# EAGLE board UART_Block-Panel-v10 (EAGLE 6.6.0), part 1 of 3
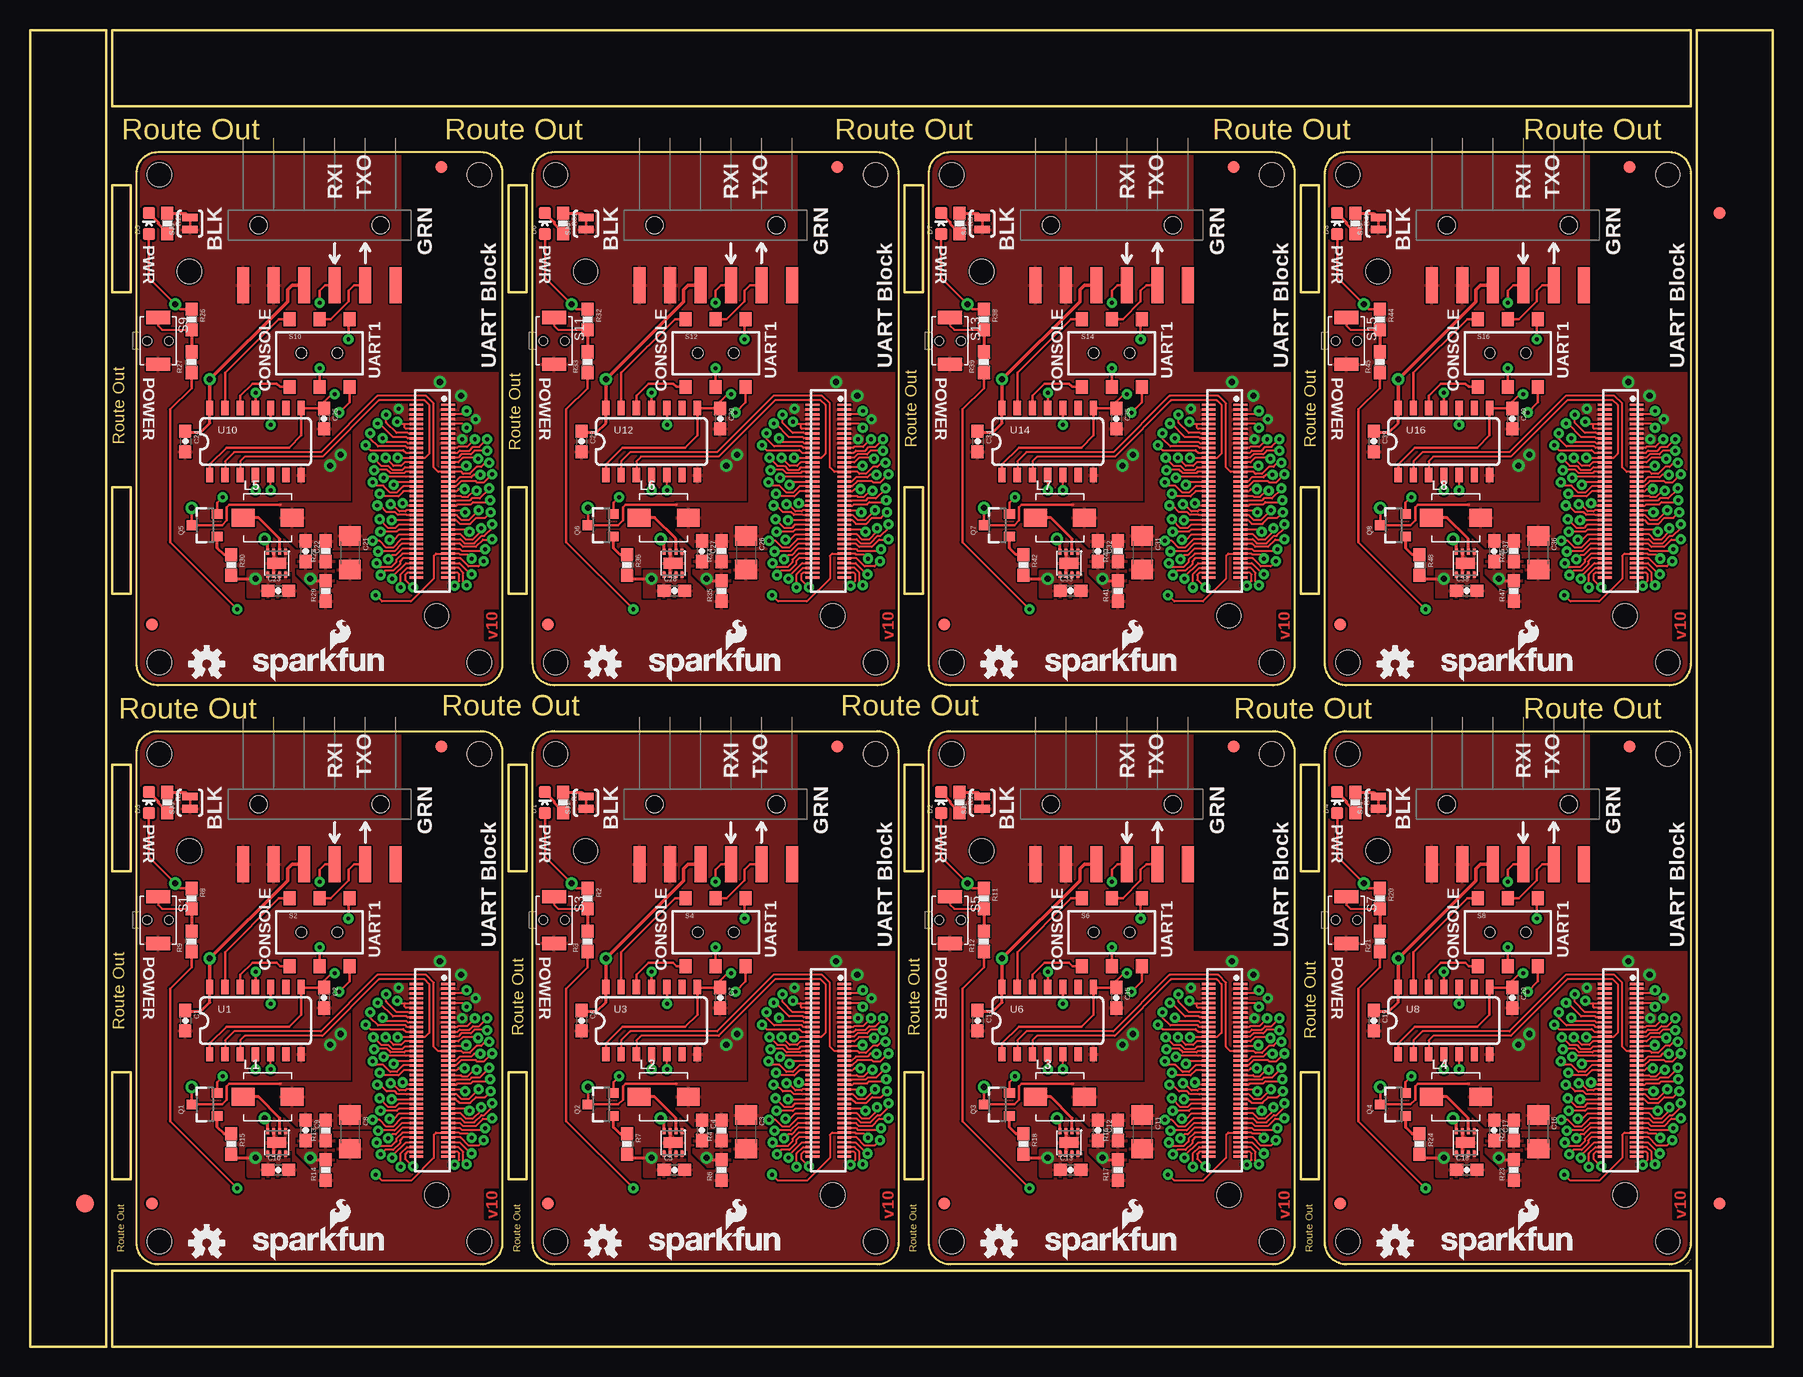
[diagram p0: board, top side]
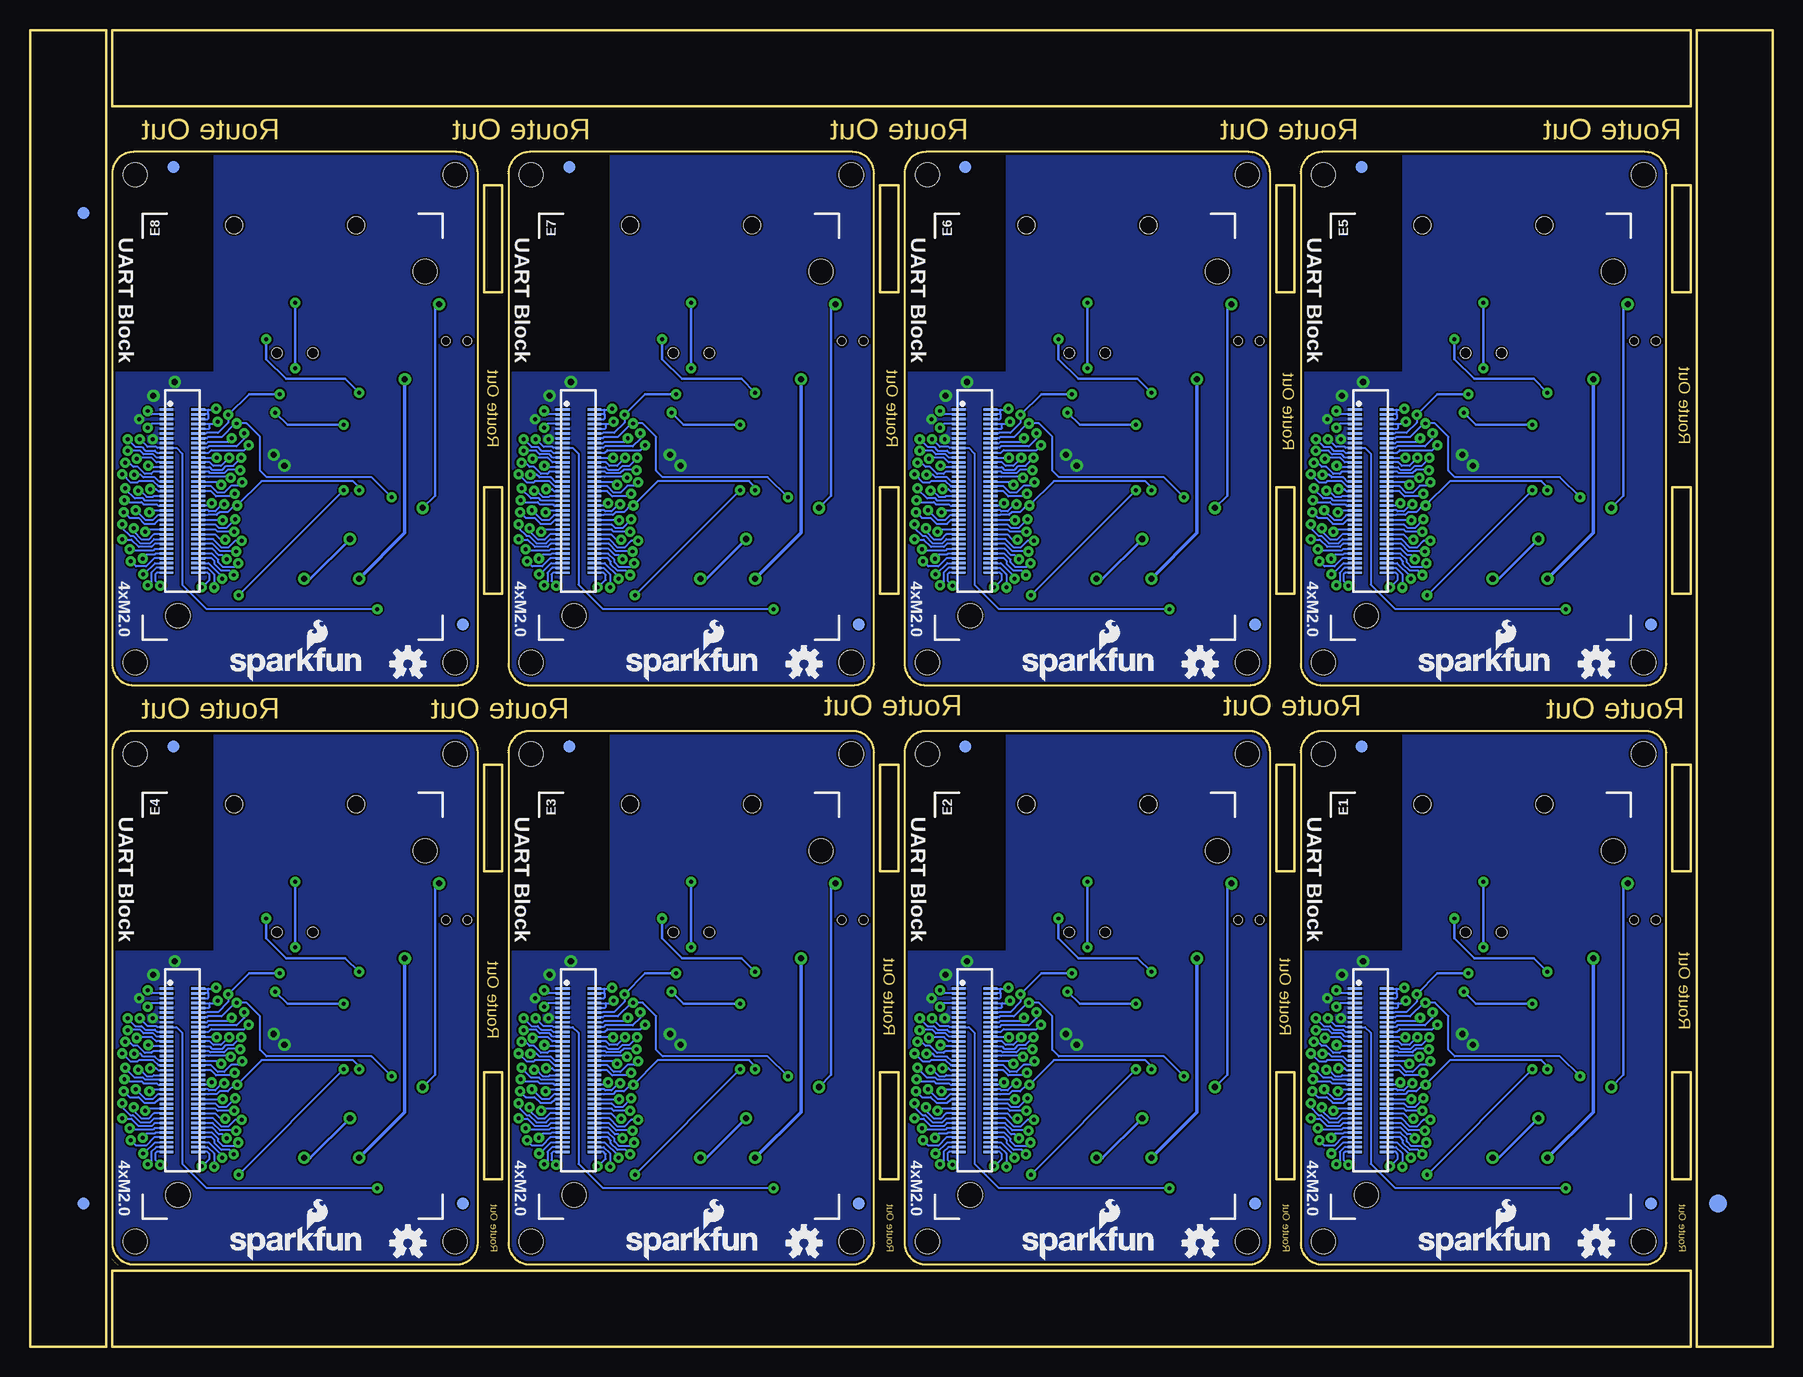
[diagram p1: board, bottom side, seen from below]

Size 145.29 x 109.73 mm. Coordinates in mm from the lower left corner, seen from the top.
Outline: 6.35,79.25 6.35,0 0,0 0,29.72
Outline: 145.29,79.25 145.29,0 138.94,0 138.94,29.72
Outline: 138.94,27.18 138.94,109.73 145.29,109.73 145.29,76.71
Outline: 0,27.18 0,109.73 6.35,109.73 6.35,76.71
Outline: 39.37,49.53 39.37,8.64 arc-90 37.59,6.86 10.67,6.86 arc-90 8.89,8.64 8.89,49.53 arc-90 10.67,51.31 37.59,51.31 arc-90 39.37,49.53
Outline: 72.39,49.53 72.39,8.64 arc-90 70.61,6.86 43.69,6.86 arc-90 41.91,8.64 41.91,49.53 arc-90 43.69,51.31 70.61,51.31 arc-90 72.39,49.53
Outline: 105.41,49.53 105.41,8.64 arc-90 103.63,6.86 76.71,6.86 arc-90 74.93,8.64 74.93,49.53 arc-90 76.71,51.31 103.63,51.31 arc-90 105.41,49.53
Outline: 138.43,49.53 138.43,8.64 arc-90 136.65,6.86 109.73,6.86 arc-90 107.95,8.64 107.95,49.53 arc-90 109.73,51.31 136.65,51.31 arc-90 138.43,49.53
Outline: 39.37,97.79 39.37,56.9 arc-90 37.59,55.12 10.67,55.12 arc-90 8.89,56.9 8.89,97.79 arc-90 10.67,99.57 37.59,99.57 arc-90 39.37,97.79
Outline: 72.39,97.79 72.39,56.9 arc-90 70.61,55.12 43.69,55.12 arc-90 41.91,56.9 41.91,97.79 arc-90 43.69,99.57 70.61,99.57 arc-90 72.39,97.79
Outline: 105.41,97.79 105.41,56.9 arc-90 103.63,55.12 76.71,55.12 arc-90 74.93,56.9 74.93,97.79 arc-90 76.71,99.57 103.63,99.57 arc-90 105.41,97.79
Outline: 138.43,97.79 138.43,56.9 arc-90 136.65,55.12 109.73,55.12 arc-90 107.95,56.9 107.95,97.79 arc-90 109.73,99.57 136.65,99.57 arc-90 138.43,97.79
Outline: 6.86,0 138.43,0 138.43,6.35 6.86,6.35 6.86,0
Outline: 138.43,109.73 6.86,109.73 6.86,103.38 138.43,103.38 138.43,109.73
Outline: 8.38,39.62 8.38,48.51 6.86,48.51 6.86,39.62 8.38,39.62
Outline: 8.38,13.97 8.38,22.86 6.86,22.86 6.86,13.97 8.38,13.97
Outline: 41.4,13.97 41.4,22.86 39.88,22.86 39.88,13.97 41.4,13.97
Outline: 74.42,13.97 74.42,22.86 72.9,22.86 72.9,13.97 74.42,13.97
Outline: 107.44,13.97 107.44,22.86 105.92,22.86 105.92,13.97 107.44,13.97
Outline: 41.4,39.62 41.4,48.51 39.88,48.51 39.88,39.62 41.4,39.62
Outline: 74.42,39.62 74.42,48.51 72.9,48.51 72.9,39.62 74.42,39.62
Outline: 107.44,39.62 107.44,48.51 105.92,48.51 105.92,39.62 107.44,39.62
Outline: 8.38,62.74 8.38,71.63 6.86,71.63 6.86,62.74 8.38,62.74
Outline: 41.4,62.74 41.4,71.63 39.88,71.63 39.88,62.74 41.4,62.74
Outline: 74.42,62.74 74.42,71.63 72.9,71.63 72.9,62.74 74.42,62.74
Outline: 107.44,62.74 107.44,71.63 105.92,71.63 105.92,62.74 107.44,62.74
Outline: 107.44,87.88 107.44,96.77 105.92,96.77 105.92,87.88 107.44,87.88
Outline: 74.42,87.88 74.42,96.77 72.9,96.77 72.9,87.88 74.42,87.88
Outline: 41.4,87.88 41.4,96.77 39.88,96.77 39.88,87.88 41.4,87.88
Outline: 8.38,87.88 8.38,96.77 6.86,96.77 6.86,87.88 8.38,87.88
Copper layers (1*16): Top 0.035mm / dielectric 1.5mm / Bottom 0.035mm
Design rules "SparkFun-2-layer *": minimum track width 6mil, minimum drill 13mil, track to track 6mil, track to pad 6mil, pad to pad 6mil, via to via 6mil, smd to smd 6mil, copper to edge 8mil, drill to drill 8mil, minimum pad ring 12mil, minimum via ring 10mil, stop-mask expansion 4mil, vias tented up to drill 20mil, thermal gap 6mil
Holes 2 mm at 37.47,8.76 10.79,8.76 10.79,49.4 37.47,49.4 70.48,8.76 43.81,8.76 43.81,49.4 70.48,49.4 103.5,8.76 76.83,8.76 76.83,49.4 103.5,49.4 136.53,8.76 109.86,8.76 109.86,49.4 136.53,49.4 37.47,57.02 10.79,57.02 10.79,97.66 37.47,97.66 70.48,57.02 43.81,57.02 43.81,97.66 70.48,97.66 103.5,57.02 76.83,57.02 76.83,97.66 103.5,97.66 136.53,57.02 109.86,57.02 109.86,97.66 136.53,97.66
tRestrict: area 31,33 to 39.4,51.3; area 64,33 to 72.4,51.3; area 97,33 to 105.4,51.3; area 130,33 to 138.4,51.3; area 31,81.3 to 39.4,99.6; area 64,81.3 to 72.4,99.6; area 97,81.3 to 105.4,99.6; area 130,81.3 to 138.4,99.6; 24 lines
bRestrict: area 31,33 to 39.4,51.3; area 64,33 to 72.4,51.3; area 97,33 to 105.4,51.3; area 130,33 to 138.4,51.3; area 31,81.3 to 39.4,99.6; area 64,81.3 to 72.4,99.6; area 97,81.3 to 105.4,99.6; area 130,81.3 to 138.4,99.6

## Footprints (pad centres in the part's own frame; a part is rotated, then mirrored left to right if it is on the bottom)
0603-CAP = smd 1.1 x 1: 1 -0.85,0; 2 0.85,0
1206 = smd 1.6 x 1.8: 1 -1.4,0; 2 1.4,0
LED-0603 = smd 1 x 1: A 0,-0.877; C 0,0.877
EDISON_DAUGHTER = smd 1.14 x 0.2: 1 1.98,19.17; 2 4.62,19.17; 3 1.98,18.77; 4 4.62,18.77; 5 1.98,18.37; 6 4.62,18.37; 7 1.98,17.97; 8 4.62,17.97; 9 1.98,17.57; 10 4.62,17.57; 11 1.98,17.17; 12 4.62,17.17; 13 1.98,16.77; 14 4.62,16.77; 15 1.98,16.37; 16 4.62,16.37; 17 1.98,15.97; 18 4.62,15.97; 19 1.98,15.57; 20 4.62,15.57; 21 1.98,15.17; 22 4.62,15.17; 23 1.98,14.77; 24 4.62,14.77; 25 1.98,14.37; 26 4.62,14.37; 27 1.98,13.97; 28 4.62,13.97; 29 1.98,13.57; 30 4.62,13.57; 31 1.98,13.17; 32 4.62,13.17; 33 1.98,12.77; 34 4.62,12.77; 35 1.98,12.37; 36 4.62,12.37; 37 1.98,11.97; 38 4.62,11.97; 39 1.98,11.57; 40 4.62,11.57; 41 1.98,11.17; 42 4.62,11.17; 43 1.98,10.77; 44 4.62,10.77; 45 1.98,10.37; 46 4.62,10.37; 47 1.98,9.97; 48 4.62,9.97; 49 1.98,9.57; 50 4.62,9.57; 51 1.98,9.17; 52 4.62,9.17; 53 1.98,8.77; 54 4.62,8.77; 55 1.98,8.37; 56 4.62,8.37; 57 1.98,7.97; 58 4.62,7.97; 59 1.98,7.57; 60 4.62,7.57; 61 1.98,7.17; 62 4.62,7.17; 63 1.98,6.77; 64 4.62,6.77; 65 1.98,6.37; 66 4.62,6.37; 67 1.98,5.97; 68 4.62,5.97; 69 1.98,5.57; 70 4.62,5.57 | hole 2: 23.53,30.67; 2.93,1.98
FIDUCIAL-1.5X3 = smd 1.5 x 1.5: 1 0,0
FIDUCIAL-1X2 = smd 1 x 1: 1 0,0
1X06-SMD = smd 1 x 3: 1 -6.35,5; 2 -3.81,5; 3 -1.27,5; 4 1.27,5; 5 3.81,5; 6 6.35,5 | hole 1.4: -5.08,0; 5.08,0
INDUCTOR-SRP4020 = smd 1.9 x 1.5: P$1 -2.05,0; P$2 2.05,0
SOT23-3 = smd 0.8 x 0.9: 1 -0.95,-1; 2 0.95,-1; 3 0,1.1
0603-RES = smd 1.1 x 1: 1 -0.85,0; 2 0.85,0
TACTILE_SWITCH-SMD-RIGHT-ANGLE = smd 1.1 x 2: 1 -1.95,0; 2 1.95,0 | hole 0.7: 0,0.9; 0,-0.9
AYZ0202 = smd 1 x 1.15: 1 -2.5,2.825; 2 0,2.825; 3 2.5,2.825; 4 -2.5,-2.825; 5 0,-2.825; 6 2.5,-2.825 | hole 0.85: 1.5,0; -1.5,0
PAD-JUMPER-2-NC_BY_TRACE_YES_SILK = smd 0.635 x 1.27: 1 -0.508,0; 2 0.508,0
SO14 = smd 0.6 x 1.2: 1 -3.81,-2.8; 2 -2.54,-2.8; 3 -1.27,-2.8; 4 0,-2.8; 5 1.27,-2.8; 6 2.54,-2.8; 7 3.81,-2.8; 8 3.81,2.8; 9 2.54,2.8; 10 1.27,2.8; 11 0,2.8; 12 -1.27,2.8; 13 -2.54,2.8; 14 -3.81,2.8
WSON-8-PAD = smd 0.25 x 0.5: 1 -0.75,-0.95; 2 -0.25,-0.95; 3 0.25,-0.95; 4 0.75,-0.95; 5 0.75,0.95; 6 0.25,0.95; 7 -0.25,0.95; 8 -0.75,0.95 | smd 1.6 x 0.9: PAD 0,0
DF40C-70DP-0.4(51) = smd 0.2 x 1.14 bottom: 1 6.8,1.32; 2 6.8,-1.32; 3 6.4,1.32; 4 6.4,-1.32; 5 6,1.32; 6 6,-1.32; 7 5.6,1.32; 8 5.6,-1.32; 9 5.2,1.32; 10 5.2,-1.32; 11 4.8,1.32; 12 4.8,-1.32; 13 4.4,1.32; 14 4.4,-1.32; 15 4,1.32; 16 4,-1.32; 17 3.6,1.32; 18 3.6,-1.32; 19 3.2,1.32; 20 3.2,-1.32; 21 2.8,1.32; 22 2.8,-1.32; 23 2.4,1.32; 24 2.4,-1.32; 25 2,1.32; 26 2,-1.32; 27 1.6,1.32; 28 1.6,-1.32; 29 1.2,1.32; 30 1.2,-1.32; 31 0.8,1.32; 32 0.8,-1.32; 33 0.4,1.32; 34 0.4,-1.32; 35 0,1.32; 36 0,-1.32; 37 -0.4,1.32; 38 -0.4,-1.32; 39 -0.8,1.32; 40 -0.8,-1.32; 41 -1.2,1.32; 42 -1.2,-1.32; 43 -1.6,1.32; 44 -1.6,-1.32; 45 -2,1.32; 46 -2,-1.32; 47 -2.4,1.32; 48 -2.4,-1.32; 49 -2.8,1.32; 50 -2.8,-1.32; 51 -3.2,1.32; 52 -3.2,-1.32; 53 -3.6,1.32; 54 -3.6,-1.32; 55 -4,1.32; 56 -4,-1.32; 57 -4.4,1.32; 58 -4.4,-1.32; 59 -4.8,1.32; 60 -4.8,-1.32; 61 -5.2,1.32; 62 -5.2,-1.32; 63 -5.6,1.32; 64 -5.6,-1.32; 65 -6,1.32; 66 -6,-1.32; 67 -6.4,1.32; 68 -6.4,-1.32; 69 -6.8,1.32; 70 -6.8,-1.32; NC1 7.2,1.32; NC2 7.2,-1.32; NC3 -7.2,-1.32; NC4 -7.2,1.32

## Placement (x,y rotation side)
C1  0.1uF  [0603-CAP]  12.95,27.18 270 top
C2  0.1uF  [0603-CAP]  24.51,29.08 270 top
C3  10uF  [1206]  59.69,17.91 270 top
C4  47pF  [0603-CAP]  56.01,18.03 270 top
C5  4.7uF  [0603-CAP]  53.72,14.73 0 top
C6  0.1uF  [0603-CAP]  45.97,27.18 270 top
C7  0.1uF  [0603-CAP]  57.53,29.08 270 top
C8  10uF  [1206]  26.67,17.91 270 top
C9  47pF  [0603-CAP]  22.99,18.03 270 top
C10  4.7uF  [0603-CAP]  20.7,14.73 0 top
C11  10uF  [1206]  92.71,17.91 270 top
C12  47pF  [0603-CAP]  89.03,18.03 270 top
C13  4.7uF  [0603-CAP]  86.74,14.73 0 top
C14  0.1uF  [0603-CAP]  78.99,27.18 270 top
C15  0.1uF  [0603-CAP]  90.55,29.08 270 top
C16  10uF  [1206]  125.73,17.91 270 top
C17  47pF  [0603-CAP]  122.05,18.03 270 top
C18  4.7uF  [0603-CAP]  119.76,14.73 0 top
C19  0.1uF  [0603-CAP]  112.01,27.18 270 top
C20  0.1uF  [0603-CAP]  123.57,29.08 270 top
C21  10uF  [1206]  26.67,66.17 270 top
C22  47pF  [0603-CAP]  22.99,66.29 270 top
C23  4.7uF  [0603-CAP]  20.7,62.99 0 top
C24  0.1uF  [0603-CAP]  12.95,75.44 270 top
C25  0.1uF  [0603-CAP]  24.51,77.34 270 top
C26  10uF  [1206]  59.69,66.17 270 top
C27  47pF  [0603-CAP]  56.01,66.29 270 top
C28  4.7uF  [0603-CAP]  53.72,62.99 0 top
C29  0.1uF  [0603-CAP]  45.97,75.44 270 top
C30  0.1uF  [0603-CAP]  57.53,77.34 270 top
C31  10uF  [1206]  92.71,66.17 270 top
C32  47pF  [0603-CAP]  89.03,66.29 270 top
C33  4.7uF  [0603-CAP]  86.74,62.99 0 top
C34  0.1uF  [0603-CAP]  78.99,75.44 270 top
C35  0.1uF  [0603-CAP]  90.55,77.34 270 top
C36  10uF  [1206]  125.73,66.17 270 top
C37  47pF  [0603-CAP]  122.05,66.29 270 top
C38  4.7uF  [0603-CAP]  119.76,62.99 0 top
C39  0.1uF  [0603-CAP]  112.01,75.44 270 top
C40  0.1uF  [0603-CAP]  123.57,77.34 270 top
D1  BLUE  [LED-0603]  42.93,45.34 0 top
D2  BLUE  [LED-0603]  75.95,45.34 0 top
D3  BLUE  [LED-0603]  9.91,45.34 0 top
D4  BLUE  [LED-0603]  108.97,45.34 0 top
D5  BLUE  [LED-0603]  9.91,93.6 0 top
D6  BLUE  [LED-0603]  42.93,93.6 0 top
D7  BLUE  [LED-0603]  75.95,93.6 0 top
D8  BLUE  [LED-0603]  108.97,93.6 0 top
E1  EDISON_CONNECTOR_FULLMOUNTING_HOLES  [EDISON_DAUGHTER]  36.83,10.67 0 bottom
E2  EDISON_CONNECTOR_FULLMOUNTING_HOLES  [EDISON_DAUGHTER]  69.85,10.67 0 bottom
E3  EDISON_CONNECTOR_FULLMOUNTING_HOLES  [EDISON_DAUGHTER]  102.87,10.67 0 bottom
E4  EDISON_CONNECTOR_FULLMOUNTING_HOLES  [EDISON_DAUGHTER]  135.89,10.67 0 bottom
E5  EDISON_CONNECTOR_FULLMOUNTING_HOLES  [EDISON_DAUGHTER]  36.83,58.93 0 bottom
E6  EDISON_CONNECTOR_FULLMOUNTING_HOLES  [EDISON_DAUGHTER]  69.85,58.93 0 bottom
E7  EDISON_CONNECTOR_FULLMOUNTING_HOLES  [EDISON_DAUGHTER]  102.87,58.93 0 bottom
E8  EDISON_CONNECTOR_FULLMOUNTING_HOLES  [EDISON_DAUGHTER]  135.89,58.93 0 bottom
E$1  [FIDUCIAL-1.5X3]  4.57,11.94 0 top
E$2  [FIDUCIAL-1.5X3]  4.57,11.94 0 bottom
E$3  [FIDUCIAL-1X2]  140.84,94.49 180 bottom
E$4  [FIDUCIAL-1X2]  140.84,11.94 0 top
E$5  [FIDUCIAL-1X2]  140.84,94.49 180 top
E$6  [FIDUCIAL-1X2]  140.84,11.94 0 bottom
FID1  FIDUCIAL1X2  [FIDUCIAL-1X2]  34.29,50.04 0 top
FID2  FIDUCIAL1X2  [FIDUCIAL-1X2]  10.16,11.94 0 top
FID3  FIDUCIAL1X2  [FIDUCIAL-1X2]  10.16,11.94 0 bottom
FID4  FIDUCIAL1X2  [FIDUCIAL-1X2]  34.29,50.04 0 bottom
FID5  FIDUCIAL1X2  [FIDUCIAL-1X2]  67.31,50.04 0 top
FID6  FIDUCIAL1X2  [FIDUCIAL-1X2]  43.18,11.94 0 top
FID7  FIDUCIAL1X2  [FIDUCIAL-1X2]  43.18,11.94 0 bottom
FID8  FIDUCIAL1X2  [FIDUCIAL-1X2]  67.31,50.04 0 bottom
FID9  FIDUCIAL1X2  [FIDUCIAL-1X2]  100.33,50.04 0 top
FID10  FIDUCIAL1X2  [FIDUCIAL-1X2]  76.2,11.94 0 top
FID11  FIDUCIAL1X2  [FIDUCIAL-1X2]  76.2,11.94 0 bottom
FID12  FIDUCIAL1X2  [FIDUCIAL-1X2]  100.33,50.04 0 bottom
FID13  FIDUCIAL1X2  [FIDUCIAL-1X2]  133.35,50.04 0 top
FID14  FIDUCIAL1X2  [FIDUCIAL-1X2]  109.22,11.94 0 top
FID15  FIDUCIAL1X2  [FIDUCIAL-1X2]  109.22,11.94 0 bottom
FID16  FIDUCIAL1X2  [FIDUCIAL-1X2]  133.35,50.04 0 bottom
FID17  FIDUCIAL1X2  [FIDUCIAL-1X2]  34.29,98.3 0 top
FID18  FIDUCIAL1X2  [FIDUCIAL-1X2]  10.16,60.2 0 top
FID19  FIDUCIAL1X2  [FIDUCIAL-1X2]  10.16,60.2 0 bottom
FID20  FIDUCIAL1X2  [FIDUCIAL-1X2]  34.29,98.3 0 bottom
FID21  FIDUCIAL1X2  [FIDUCIAL-1X2]  67.31,98.3 0 top
FID22  FIDUCIAL1X2  [FIDUCIAL-1X2]  43.18,60.2 0 top
FID23  FIDUCIAL1X2  [FIDUCIAL-1X2]  43.18,60.2 0 bottom
FID24  FIDUCIAL1X2  [FIDUCIAL-1X2]  67.31,98.3 0 bottom
FID25  FIDUCIAL1X2  [FIDUCIAL-1X2]  100.33,98.3 0 top
FID26  FIDUCIAL1X2  [FIDUCIAL-1X2]  76.2,60.2 0 top
FID27  FIDUCIAL1X2  [FIDUCIAL-1X2]  76.2,60.2 0 bottom
FID28  FIDUCIAL1X2  [FIDUCIAL-1X2]  100.33,98.3 0 bottom
FID29  FIDUCIAL1X2  [FIDUCIAL-1X2]  133.35,98.3 0 top
FID30  FIDUCIAL1X2  [FIDUCIAL-1X2]  109.22,60.2 0 top
FID31  FIDUCIAL1X2  [FIDUCIAL-1X2]  109.22,60.2 0 bottom
FID32  FIDUCIAL1X2  [FIDUCIAL-1X2]  133.35,98.3 0 bottom
JP1  [1X06-SMD]  57.15,45.21 180 top
JP2  [1X06-SMD]  24.13,45.21 180 top
JP3  [1X06-SMD]  90.17,45.21 180 top
JP4  [1X06-SMD]  123.19,45.21 180 top
JP5  [1X06-SMD]  24.13,93.47 180 top
JP6  [1X06-SMD]  57.15,93.47 180 top
JP7  [1X06-SMD]  90.17,93.47 180 top
JP8  [1X06-SMD]  123.19,93.47 180 top
L1  [INDUCTOR-SRP4020]  19.81,20.83 0 top
L2  [INDUCTOR-SRP4020]  52.83,20.83 0 top
L3  [INDUCTOR-SRP4020]  85.85,20.83 0 top
L4  [INDUCTOR-SRP4020]  118.87,20.83 0 top
L5  [INDUCTOR-SRP4020]  19.81,69.09 0 top
L6  [INDUCTOR-SRP4020]  52.83,69.09 0 top
L7  [INDUCTOR-SRP4020]  85.85,69.09 0 top
L8  [INDUCTOR-SRP4020]  118.87,69.09 0 top
LOGO1  SFE_LOGO_NAME_FLAME.1_INCH  [SFE_LOGO_NAME_FLAME_.1]  18.16,7.11 0 top
LOGO2  OSHW-LOGOS  [OSHW-LOGO-S]  14.73,8.64 0 bottom
LOGO3  SFE_LOGO_NAME_FLAME.1_INCH  [SFE_LOGO_NAME_FLAME_.1]  29.97,7.11 0 bottom
LOGO4  OSHW-LOGOS  [OSHW-LOGO-S]  14.73,8.64 0 top
LOGO5  OSHW-LOGOS  [OSHW-LOGO-S]  47.75,8.64 0 bottom
LOGO6  SFE_LOGO_NAME_FLAME.1_INCH  [SFE_LOGO_NAME_FLAME_.1]  62.99,7.11 0 bottom
LOGO7  SFE_LOGO_NAME_FLAME.1_INCH  [SFE_LOGO_NAME_FLAME_.1]  51.18,7.11 0 top
LOGO8  OSHW-LOGOS  [OSHW-LOGO-S]  47.75,8.64 0 top
LOGO9  OSHW-LOGOS  [OSHW-LOGO-S]  80.77,8.64 0 bottom
LOGO10  SFE_LOGO_NAME_FLAME.1_INCH  [SFE_LOGO_NAME_FLAME_.1]  96.01,7.11 0 bottom
LOGO11  SFE_LOGO_NAME_FLAME.1_INCH  [SFE_LOGO_NAME_FLAME_.1]  84.2,7.11 0 top
LOGO12  OSHW-LOGOS  [OSHW-LOGO-S]  80.77,8.64 0 top
LOGO13  OSHW-LOGOS  [OSHW-LOGO-S]  113.79,8.64 0 bottom
LOGO14  SFE_LOGO_NAME_FLAME.1_INCH  [SFE_LOGO_NAME_FLAME_.1]  129.03,7.11 0 bottom
LOGO15  SFE_LOGO_NAME_FLAME.1_INCH  [SFE_LOGO_NAME_FLAME_.1]  117.22,7.11 0 top
LOGO16  OSHW-LOGOS  [OSHW-LOGO-S]  113.79,8.64 0 top
LOGO17  OSHW-LOGOS  [OSHW-LOGO-S]  14.73,56.9 0 bottom
LOGO18  SFE_LOGO_NAME_FLAME.1_INCH  [SFE_LOGO_NAME_FLAME_.1]  29.97,55.37 0 bottom
LOGO19  SFE_LOGO_NAME_FLAME.1_INCH  [SFE_LOGO_NAME_FLAME_.1]  18.16,55.37 0 top
LOGO20  OSHW-LOGOS  [OSHW-LOGO-S]  14.73,56.9 0 top
LOGO21  OSHW-LOGOS  [OSHW-LOGO-S]  47.75,56.9 0 bottom
LOGO22  SFE_LOGO_NAME_FLAME.1_INCH  [SFE_LOGO_NAME_FLAME_.1]  62.99,55.37 0 bottom
LOGO23  SFE_LOGO_NAME_FLAME.1_INCH  [SFE_LOGO_NAME_FLAME_.1]  51.18,55.37 0 top
LOGO24  OSHW-LOGOS  [OSHW-LOGO-S]  47.75,56.9 0 top
LOGO25  OSHW-LOGOS  [OSHW-LOGO-S]  80.77,56.9 0 bottom
LOGO26  SFE_LOGO_NAME_FLAME.1_INCH  [SFE_LOGO_NAME_FLAME_.1]  96.01,55.37 0 bottom
LOGO27  SFE_LOGO_NAME_FLAME.1_INCH  [SFE_LOGO_NAME_FLAME_.1]  84.2,55.37 0 top
LOGO28  OSHW-LOGOS  [OSHW-LOGO-S]  80.77,56.9 0 top
LOGO29  OSHW-LOGOS  [OSHW-LOGO-S]  113.79,56.9 0 bottom
LOGO30  SFE_LOGO_NAME_FLAME.1_INCH  [SFE_LOGO_NAME_FLAME_.1]  129.03,55.37 0 bottom
LOGO31  SFE_LOGO_NAME_FLAME.1_INCH  [SFE_LOGO_NAME_FLAME_.1]  117.22,55.37 0 top
LOGO32  OSHW-LOGOS  [OSHW-LOGO-S]  113.79,56.9 0 top
Q1  BSS138  [SOT23-3]  14.61,20.19 90 top
Q2  BSS138  [SOT23-3]  47.62,20.19 90 top
Q3  BSS138  [SOT23-3]  80.64,20.19 90 top
Q4  BSS138  [SOT23-3]  113.67,20.19 90 top
Q5  BSS138  [SOT23-3]  14.61,68.45 90 top
Q6  BSS138  [SOT23-3]  47.62,68.45 90 top
Q7  BSS138  [SOT23-3]  80.64,68.45 90 top
Q8  BSS138  [SOT23-3]  113.67,68.45 90 top
R1  1K  [0603-RES]  44.45,45.34 270 top
R2  10K  [0603-RES]  46.48,37.34 270 top
R3  22  [0603-RES]  46.48,33.78 90 top
R4  680k  [0603-RES]  57.66,18.03 90 top
R5  1K  [0603-RES]  11.43,45.34 270 top
R6  120k  [0603-RES]  57.66,14.73 90 top
R7  1K  [0603-RES]  49.78,16.89 270 top
R8  10K  [0603-RES]  13.46,37.34 270 top
R9  22  [0603-RES]  13.46,33.78 90 top
R10  1K  [0603-RES]  77.47,45.34 270 top
R11  10K  [0603-RES]  79.5,37.34 270 top
R12  22  [0603-RES]  79.5,33.78 90 top
R13  680k  [0603-RES]  24.64,18.03 90 top
R14  120k  [0603-RES]  24.64,14.73 90 top
R15  1K  [0603-RES]  16.76,16.89 270 top
R16  680k  [0603-RES]  90.68,18.03 90 top
R17  120k  [0603-RES]  90.68,14.73 90 top
R18  1K  [0603-RES]  82.8,16.89 270 top
R19  1K  [0603-RES]  110.49,45.34 270 top
R20  10K  [0603-RES]  112.52,37.34 270 top
R21  22  [0603-RES]  112.52,33.78 90 top
R22  680k  [0603-RES]  123.7,18.03 90 top
R23  120k  [0603-RES]  123.7,14.73 90 top
R24  1K  [0603-RES]  115.82,16.89 270 top
R25  1K  [0603-RES]  11.43,93.6 270 top
R26  10K  [0603-RES]  13.46,85.6 270 top
R27  22  [0603-RES]  13.46,82.04 90 top
R28  680k  [0603-RES]  24.64,66.29 90 top
R29  120k  [0603-RES]  24.64,62.99 90 top
R30  1K  [0603-RES]  16.76,65.15 270 top
R31  1K  [0603-RES]  44.45,93.6 270 top
R32  10K  [0603-RES]  46.48,85.6 270 top
R33  22  [0603-RES]  46.48,82.04 90 top
R34  680k  [0603-RES]  57.66,66.29 90 top
R35  120k  [0603-RES]  57.66,62.99 90 top
R36  1K  [0603-RES]  49.78,65.15 270 top
R37  1K  [0603-RES]  77.47,93.6 270 top
R38  10K  [0603-RES]  79.5,85.6 270 top
R39  22  [0603-RES]  79.5,82.04 90 top
R40  680k  [0603-RES]  90.68,66.29 90 top
R41  120k  [0603-RES]  90.68,62.99 90 top
R42  1K  [0603-RES]  82.8,65.15 270 top
R43  1K  [0603-RES]  110.49,93.6 270 top
R44  10K  [0603-RES]  112.52,85.6 270 top
R45  22  [0603-RES]  112.52,82.04 90 top
R46  680k  [0603-RES]  123.7,66.29 90 top
R47  120k  [0603-RES]  123.7,62.99 90 top
R48  1K  [0603-RES]  115.82,65.15 270 top
S1  POWER  [TACTILE_SWITCH-SMD-RIGHT-ANGLE]  10.67,35.56 270 top
S2  DPDT  [AYZ0202]  24.13,34.54 0 top
S3  POWER  [TACTILE_SWITCH-SMD-RIGHT-ANGLE]  43.69,35.56 270 top
S4  DPDT  [AYZ0202]  57.15,34.54 0 top
S5  POWER  [TACTILE_SWITCH-SMD-RIGHT-ANGLE]  76.71,35.56 270 top
S6  DPDT  [AYZ0202]  90.17,34.54 0 top
S7  POWER  [TACTILE_SWITCH-SMD-RIGHT-ANGLE]  109.73,35.56 270 top
S8  DPDT  [AYZ0202]  123.19,34.54 0 top
S9  POWER  [TACTILE_SWITCH-SMD-RIGHT-ANGLE]  10.67,83.82 270 top
S10  DPDT  [AYZ0202]  24.13,82.8 0 top
S11  POWER  [TACTILE_SWITCH-SMD-RIGHT-ANGLE]  43.69,83.82 270 top
S12  DPDT  [AYZ0202]  57.15,82.8 0 top
S13  POWER  [TACTILE_SWITCH-SMD-RIGHT-ANGLE]  76.71,83.82 270 top
S14  DPDT  [AYZ0202]  90.17,82.8 0 top
S15  POWER  [TACTILE_SWITCH-SMD-RIGHT-ANGLE]  109.73,83.82 270 top
S16  DPDT  [AYZ0202]  123.19,82.8 0 top
SJ1  JUMPER-PAD-2-NC_BY_TRACE  [PAD-JUMPER-2-NC_BY_TRACE_YES_SILK]  46.35,45.34 90 top
SJ2  JUMPER-PAD-2-NC_BY_TRACE  [PAD-JUMPER-2-NC_BY_TRACE_YES_SILK]  79.38,45.34 90 top
SJ3  JUMPER-PAD-2-NC_BY_TRACE  [PAD-JUMPER-2-NC_BY_TRACE_YES_SILK]  13.34,45.34 90 top
SJ4  JUMPER-PAD-2-NC_BY_TRACE  [PAD-JUMPER-2-NC_BY_TRACE_YES_SILK]  112.39,45.34 90 top
SJ5  JUMPER-PAD-2-NC_BY_TRACE  [PAD-JUMPER-2-NC_BY_TRACE_YES_SILK]  13.34,93.6 90 top
SJ6  JUMPER-PAD-2-NC_BY_TRACE  [PAD-JUMPER-2-NC_BY_TRACE_YES_SILK]  46.35,93.6 90 top
SJ7  JUMPER-PAD-2-NC_BY_TRACE  [PAD-JUMPER-2-NC_BY_TRACE_YES_SILK]  79.38,93.6 90 top
SJ8  JUMPER-PAD-2-NC_BY_TRACE  [PAD-JUMPER-2-NC_BY_TRACE_YES_SILK]  112.39,93.6 90 top
U1  [SO14]  18.8,27.18 0 top
U2  TPS62065  [WSON-8-PAD]  53.59,17.02 180 top
U3  [SO14]  51.82,27.18 0 top
U4  TPS62065  [WSON-8-PAD]  20.57,17.02 180 top
U5  TPS62065  [WSON-8-PAD]  86.61,17.02 180 top
U6  [SO14]  84.84,27.18 0 top
U7  TPS62065  [WSON-8-PAD]  119.63,17.02 180 top
U8  [SO14]  117.86,27.18 0 top
U9  TPS62065  [WSON-8-PAD]  20.57,65.28 180 top
U10  [SO14]  18.8,75.44 0 top
U11  TPS62065  [WSON-8-PAD]  53.59,65.28 180 top
U12  [SO14]  51.82,75.44 0 top
U13  TPS62065  [WSON-8-PAD]  86.61,65.28 180 top
U14  [SO14]  84.84,75.44 0 top
U15  TPS62065  [WSON-8-PAD]  119.63,65.28 180 top
U16  [SO14]  117.86,75.44 0 top
U$1  EDISON_CONNECTOR_FULLHEADER  [DF40C-70DP-0.4(51)]  66.55,23.04 90 bottom
U$2  EDISON_CONNECTOR_FULLHEADER  [DF40C-70DP-0.4(51)]  99.57,23.04 90 bottom
U$3  EDISON_CONNECTOR_FULLHEADER  [DF40C-70DP-0.4(51)]  33.53,23.04 90 bottom
U$4  EDISON_CONNECTOR_FULLHEADER  [DF40C-70DP-0.4(51)]  132.59,23.04 90 bottom
U$5  EDISON_CONNECTOR_FULLHEADER  [DF40C-70DP-0.4(51)]  33.53,71.3 90 bottom
U$6  EDISON_CONNECTOR_FULLHEADER  [DF40C-70DP-0.4(51)]  66.55,71.3 90 bottom
U$7  EDISON_CONNECTOR_FULLHEADER  [DF40C-70DP-0.4(51)]  99.57,71.3 90 bottom
U$8  EDISON_CONNECTOR_FULLHEADER  [DF40C-70DP-0.4(51)]  132.59,71.3 90 bottom

## Library data of the parts
C1 C2 C6 C7 C14 C15 C19 C20 C24 C25 C29 C30 C34 C35 C39 C40 = SparkFun-Capacitors; PROD_ID: CAP-00810
C3 C8 C11 C16 C21 C26 C31 C36 = SparkFun-Capacitors; PROD_ID: CAP-10057
C4 C9 C12 C17 C22 C27 C32 C37 = SparkFun-Capacitors; PROD_ID: CAP-08913
C5 C10 C13 C18 C23 C28 C33 C38 = SparkFun-Capacitors; PROD_ID: CAP-08280
D1-D8 = SparkFun-LED; PROD_ID: DIO-08575
E1-E8 U$1-U$8 = Edison
E$1 E$2 = SparkFun-Retired
E$3-E$6 FID1-FID32 LOGO1-LOGO32 = SparkFun-Aesthetics
JP1-JP8 = SparkFun-Connectors
L1-L8 SJ1-SJ8 = SparkFun-Passives
Q1-Q8 = SparkFun-DiscreteSemi; PROD_ID: TRANS-00830
R1 R5 R7 R10 R15 R18 R19 R24 R25 R30 R31 R36 R37 R42 R43 R48 = SparkFun-Resistors; PROD_ID: RES-07856
R2 R8 R11 R20 R26 R32 R38 R44 = SparkFun-Resistors; PROD_ID: RES-00824
R3 R9 R12 R21 R27 R33 R39 R45 = SparkFun-Resistors; PROD_ID: RES-08698
R4 R6 R13 R14 R16 R17 R22 R23 R28 R29 R34 R35 R40 R41 R46 R47 = SparkFun-Resistors
S1 S3 S5 S7 S9 S11 S13 S15 = SparkFun-Electromechanical; PROD_ID: COMP-12265
S2 S4 S6 S8 S10 S12 S14 S16 = SparkFun-Electromechanical; PROD_ID: SWCH-08179
U1 U3 U6 U8 U10 U12 U14 U16 = SparkFun-DigitalIC; PROD_ID: IC-11329
U2 U4 U5 U7 U9 U11 U13 U15 = Testing

## Nets
1.8V: C2.1 E1.12 U1.1 U1.8 U$3.12
1.8V1: C7.1 E2.12 U3.1 U3.8 U$1.12
1.8V2: C15.1 E3.12 U6.1 U6.8 U$2.12
1.8V3: C20.1 E4.12 U8.1 U8.8 U$4.12
1.8V4: C25.1 E5.12 U10.1 U10.8 U$5.12
1.8V5: C30.1 E6.12 U12.1 U12.8 U$6.12
1.8V6: C35.1 E7.12 U14.1 U14.8 U$7.12
1.8V7: C40.1 E8.12 U16.1 U16.8 U$8.12
3.3V: E1.8 E1.10 U$3.8 U$3.10
3.3V1: E2.8 E2.10 U$1.8 U$1.10
3.3V2: E3.8 E3.10 U$2.8 U$2.10
3.3V3: E4.8 E4.10 U$4.8 U$4.10
3.3V4: E5.8 E5.10 U$5.8 U$5.10
3.3V5: E6.8 E6.10 U$6.8 U$6.10
3.3V6: E7.8 E7.10 U$7.8 U$7.10
3.3V7: E8.8 E8.10 U$8.8 U$8.10
DCIN: E1.14 Q1.2 U$3.14
DCIN1: E2.14 Q2.2 U$1.14
DCIN2: E3.14 Q3.2 U$2.14
DCIN3: E4.14 Q4.2 U$4.14
DCIN4: E5.14 Q5.2 U$5.14
DCIN5: E6.14 Q6.2 U$6.14
DCIN6: E7.14 Q7.2 U$7.14
DCIN7: E8.14 Q8.2 U$8.14
FAULT: E1.19 U$3.19
FAULT1: E2.19 U$1.19
FAULT2: E3.19 U$2.19
FAULT3: E4.19 U$4.19
FAULT4: E5.19 U$5.19
FAULT5: E6.19 U$6.19
FAULT6: E7.19 U$7.19
FAULT7: E8.19 U$8.19
FW_RCVR: E1.69 U$3.69
FW_RCVR1: E2.69 U$1.69
FW_RCVR2: E3.69 U$2.69
FW_RCVR3: E4.69 U$4.69
FW_RCVR4: E5.69 U$5.69
FW_RCVR5: E6.69 U$6.69
FW_RCVR6: E7.69 U$7.69
FW_RCVR7: E8.69 U$8.69
GND: C1.2 C2.2 C8.2 C10.2 E1.1 E1.5 E1.9 E1.11 E1.13 E1.15 JP2.5 JP2.6 R14.1 S1.2 SJ3.1 U1.7 U4.1 U4.3 U4.6 U4.PAD U$3.1 U$3.5 U$3.9 U$3.11 U$3.13 U$3.15
GND1: C3.2 C5.2 C6.2 C7.2 E2.1 E2.5 E2.9 E2.11 E2.13 E2.15 JP1.5 JP1.6 R6.1 S3.2 SJ1.1 U2.1 U2.3 U2.6 U2.PAD U3.7 U$1.1 U$1.5 U$1.9 U$1.11 U$1.13 U$1.15
GND2: C11.2 C13.2 C14.2 C15.2 E3.1 E3.5 E3.9 E3.11 E3.13 E3.15 JP3.5 JP3.6 R17.1 S5.2 SJ2.1 U5.1 U5.3 U5.6 U5.PAD U6.7 U$2.1 U$2.5 U$2.9 U$2.11 U$2.13 U$2.15
GND3: C16.2 C18.2 C19.2 C20.2 E4.1 E4.5 E4.9 E4.11 E4.13 E4.15 JP4.5 JP4.6 R23.1 S7.2 SJ4.1 U7.1 U7.3 U7.6 U7.PAD U8.7 U$4.1 U$4.5 U$4.9 U$4.11 U$4.13 U$4.15
GND4: C21.2 C23.2 C24.2 C25.2 E5.1 E5.5 E5.9 E5.11 E5.13 E5.15 JP5.5 JP5.6 R29.1 S9.2 SJ5.1 U9.1 U9.3 U9.6 U9.PAD U10.7 U$5.1 U$5.5 U$5.9 U$5.11 U$5.13 U$5.15
GND5: C26.2 C28.2 C29.2 C30.2 E6.1 E6.5 E6.9 E6.11 E6.13 E6.15 JP6.5 JP6.6 R35.1 S11.2 SJ6.1 U11.1 U11.3 U11.6 U11.PAD U12.7 U$6.1 U$6.5 U$6.9 U$6.11 U$6.13 U$6.15
GND6: C31.2 C33.2 C34.2 C35.2 E7.1 E7.5 E7.9 E7.11 E7.13 E7.15 JP7.5 JP7.6 R41.1 S13.2 SJ7.1 U13.1 U13.3 U13.6 U13.PAD U14.7 U$7.1 U$7.5 U$7.9 U$7.11 U$7.13 U$7.15
GND7: C36.2 C38.2 C39.2 C40.2 E8.1 E8.5 E8.9 E8.11 E8.13 E8.15 JP8.5 JP8.6 R47.1 S15.2 SJ8.1 U15.1 U15.3 U15.6 U15.PAD U16.7 U$8.1 U$8.5 U$8.9 U$8.11 U$8.13 U$8.15
GP1: E2.48 U$1.48
GP2: E2.42 U$1.42
GP3: E2.34 U$1.34
GP4: E2.32 U$1.32
GP5: E2.30 U$1.30
GP6: E2.28 U$1.28
GP7: E2.26 U$1.26
GP8: E2.25 U$1.25
GP9: E2.24 U$1.24
GP10: E3.48 U$2.48
GP11: E3.42 U$2.42
GP12: E3.34 U$2.34
GP12_PWM0: E1.35 U$3.35
GP12_PWM1: E2.35 U$1.35
GP12_PWM2: E3.35 U$2.35
GP12_PWM3: E4.35 U$4.35
GP12_PWM4: E5.35 U$5.35
GP12_PWM5: E6.35 U$6.35
GP12_PWM6: E7.35 U$7.35
GP12_PWM7: E8.35 U$8.35
GP13: E3.32 U$2.32
GP13_PWM1: E1.33 U$3.33
GP13_PWM2: E2.33 U$1.33
GP13_PWM3: E3.33 U$2.33
GP13_PWM4: E4.33 U$4.33
GP13_PWM5: E5.33 U$5.33
GP13_PWM6: E6.33 U$6.33
GP13_PWM7: E7.33 U$7.33
GP13_PWM8: E8.33 U$8.33
GP14: E1.48 U$3.48
GP15: E1.42 U$3.42
GP16: E3.30 U$2.30
GP17: E3.28 U$2.28
GP18: E3.26 U$2.26
GP19: E3.25 U$2.25
GP19_I2C_1_SCL: E1.41 U$3.41
GP19_I2C_1_SCL1: E2.41 U$1.41
GP19_I2C_1_SCL2: E3.41 U$2.41
GP19_I2C_1_SCL3: E4.41 U$4.41
GP19_I2C_1_SCL4: E5.41 U$5.41
GP19_I2C_1_SCL5: E6.41 U$6.41
GP19_I2C_1_SCL6: E7.41 U$7.41
GP19_I2C_1_SCL7: E8.41 U$8.41
GP20: E3.24 U$2.24
GP20_I2C_1_SDA: E1.43 U$3.43
GP20_I2C_1_SDA1: E2.43 U$1.43
GP20_I2C_1_SDA2: E3.43 U$2.43
GP20_I2C_1_SDA3: E4.43 U$4.43
GP20_I2C_1_SDA4: E5.43 U$5.43
GP20_I2C_1_SDA5: E6.43 U$6.43
GP20_I2C_1_SDA6: E7.43 U$7.43
GP20_I2C_1_SDA7: E8.43 U$8.43
GP21: E4.48 U$4.48
GP22: E4.42 U$4.42
GP23: E4.34 U$4.34
GP24: E4.32 U$4.32
GP25: E4.30 U$4.30
GP26: E4.28 U$4.28
GP27: E4.26 U$4.26
GP27_I2C_6_SCL: E1.45 U$3.45
GP27_I2C_6_SCL1: E2.45 U$1.45
GP27_I2C_6_SCL2: E3.45 U$2.45
GP27_I2C_6_SCL3: E4.45 U$4.45
GP27_I2C_6_SCL4: E5.45 U$5.45
GP27_I2C_6_SCL5: E6.45 U$6.45
GP27_I2C_6_SCL6: E7.45 U$7.45
GP27_I2C_6_SCL7: E8.45 U$8.45
GP28: E4.25 U$4.25
GP28_I2C_6_SDA: E1.47 U$3.47
GP28_I2C_6_SDA1: E2.47 U$1.47
GP28_I2C_6_SDA2: E3.47 U$2.47
GP28_I2C_6_SDA3: E4.47 U$4.47
GP28_I2C_6_SDA4: E5.47 U$5.47
GP28_I2C_6_SDA5: E6.47 U$6.47
GP28_I2C_6_SDA6: E7.47 U$7.47
GP28_I2C_6_SDA7: E8.47 U$8.47
GP29: E4.24 U$4.24
GP30: E5.48 U$5.48
GP31: E5.42 U$5.42
GP32: E5.34 U$5.34
GP33: E5.32 U$5.32
GP34: E5.30 U$5.30
GP35: E5.28 U$5.28
GP36: E5.26 U$5.26
GP37: E5.25 U$5.25
GP38: E5.24 U$5.24
GP39: E6.48 U$6.48
GP40: E6.42 U$6.42
GP40_I2S_2_CLK: E1.52 U$3.52
GP40_I2S_2_CLK1: E2.52 U$1.52
GP40_I2S_2_CLK2: E3.52 U$2.52
GP40_I2S_2_CLK3: E4.52 U$4.52
GP40_I2S_2_CLK4: E5.52 U$5.52
GP40_I2S_2_CLK5: E6.52 U$6.52
GP40_I2S_2_CLK6: E7.52 U$7.52
GP40_I2S_2_CLK7: E8.52 U$8.52
GP41: E6.34 U$6.34
GP41_I2S_2_FS: E1.54 U$3.54
GP41_I2S_2_FS1: E2.54 U$1.54
GP41_I2S_2_FS2: E3.54 U$2.54
GP41_I2S_2_FS3: E4.54 U$4.54
GP41_I2S_2_FS4: E5.54 U$5.54
GP41_I2S_2_FS5: E6.54 U$6.54
GP41_I2S_2_FS6: E7.54 U$7.54
GP41_I2S_2_FS7: E8.54 U$8.54
GP42: E6.32 U$6.32
GP42_I2S_2_RXD: E1.50 U$3.50
GP42_I2S_2_RXD1: E2.50 U$1.50
GP42_I2S_2_RXD2: E3.50 U$2.50
GP42_I2S_2_RXD3: E4.50 U$4.50
GP42_I2S_2_RXD4: E5.50 U$5.50
GP42_I2S_2_RXD5: E6.50 U$6.50
GP42_I2S_2_RXD6: E7.50 U$7.50
GP42_I2S_2_RXD7: E8.50 U$8.50
GP43: E6.30 U$6.30
GP43_I2S_2_TXD: E1.56 U$3.56
GP43_I2S_2_TXD1: E2.56 U$1.56
GP43_I2S_2_TXD2: E3.56 U$2.56
GP43_I2S_2_TXD3: E4.56 U$4.56
GP43_I2S_2_TXD4: E5.56 U$5.56
GP43_I2S_2_TXD5: E6.56 U$6.56
GP43_I2S_2_TXD6: E7.56 U$7.56
GP43_I2S_2_TXD7: E8.56 U$8.56
GP44: E1.24 U$3.24
GP45: E1.26 U$3.26
GP46: E1.28 U$3.28
GP47: E1.30 U$3.30
GP48: E1.32 U$3.32
GP49: E1.34 U$3.34
GP50: E6.28 U$6.28
GP51: E6.26 U$6.26
GP52: E6.25 U$6.25
GP53: E6.24 U$6.24
GP54: E7.48 U$7.48
GP55: E7.42 U$7.42
GP56: E7.34 U$7.34
GP57: E7.32 U$7.32
GP58: E7.30 U$7.30
GP59: E7.28 U$7.28
GP60: E7.26 U$7.26
GP61: E7.25 U$7.25
GP62: E7.24 U$7.24
GP63: E8.48 U$8.48
GP64: E8.42 U$8.42
GP65: E8.34 U$8.34
GP66: E8.32 U$8.32
GP67: E8.30 U$8.30
GP68: E8.28 U$8.28
GP69: E8.26 U$8.26
GP70: E8.25 U$8.25
GP71: E8.24 U$8.24
GP77_SD_0_CD#: E1.60 U$3.60
GP77_SD_0_CD#1: E2.60 U$1.60
GP77_SD_0_CD#2: E3.60 U$2.60
GP77_SD_0_CD#3: E4.60 U$4.60
GP77_SD_0_CD#4: E5.60 U$5.60
GP77_SD_0_CD#5: E6.60 U$6.60
GP77_SD_0_CD#6: E7.60 U$7.60
GP77_SD_0_CD#7: E8.60 U$8.60
GP78_SD_0_CLK: E1.58 U$3.58
GP78_SD_0_CLK1: E2.58 U$1.58
GP78_SD_0_CLK2: E3.58 U$2.58
GP78_SD_0_CLK3: E4.58 U$4.58
GP78_SD_0_CLK4: E5.58 U$5.58
GP78_SD_0_CLK5: E6.58 U$6.58
GP78_SD_0_CLK6: E7.58 U$7.58
GP78_SD_0_CLK7: E8.58 U$8.58
GP79_SD_0_CMD: E1.62 U$3.62
GP79_SD_0_CMD1: E2.62 U$1.62
GP79_SD_0_CMD2: E3.62 U$2.62
GP79_SD_0_CMD3: E4.62 U$4.62
GP79_SD_0_CMD4: E5.62 U$5.62
GP79_SD_0_CMD5: E6.62 U$6.62
GP79_SD_0_CMD6: E7.62 U$7.62
GP79_SD_0_CMD7: E8.62 U$8.62
GP80_SD_0_DAT0: E1.66 U$3.66
GP80_SD_0_DAT1: E2.66 U$1.66
GP80_SD_0_DAT2: E3.66 U$2.66
GP80_SD_0_DAT3: E4.66 U$4.66
GP80_SD_0_DAT4: E5.66 U$5.66
GP80_SD_0_DAT5: E6.66 U$6.66
GP80_SD_0_DAT6: E7.66 U$7.66
GP80_SD_0_DAT7: E8.66 U$8.66
GP81_SD_0_DAT1: E1.70 U$3.70
GP81_SD_0_DAT2: E2.70 U$1.70
GP81_SD_0_DAT3: E3.70 U$2.70
GP81_SD_0_DAT4: E4.70 U$4.70
GP81_SD_0_DAT5: E5.70 U$5.70
GP81_SD_0_DAT6: E6.70 U$6.70
GP81_SD_0_DAT7: E7.70 U$7.70
GP81_SD_0_DAT8: E8.70 U$8.70
GP82_SD_0_DAT1: E2.64 U$1.64
GP82_SD_0_DAT2: E1.64 U$3.64
GP82_SD_0_DAT3: E3.64 U$2.64
GP82_SD_0_DAT4: E4.64 U$4.64
GP82_SD_0_DAT5: E5.64 U$5.64
GP82_SD_0_DAT6: E6.64 U$6.64
GP82_SD_0_DAT7: E7.64 U$7.64
GP82_SD_0_DAT8: E8.64 U$8.64
GP83_SD_0_DAT1: E2.68 U$1.68
GP83_SD_0_DAT2: E3.68 U$2.68
GP83_SD_0_DAT3: E1.68 U$3.68
GP83_SD_0_DAT4: E4.68 U$4.68
GP83_SD_0_DAT5: E5.68 U$5.68
GP83_SD_0_DAT6: E6.68 U$6.68
GP83_SD_0_DAT7: E7.68 U$7.68
GP83_SD_0_DAT8: E8.68 U$8.68
GP84_SD_CLK_FB: E1.44 U$3.44
GP84_SD_CLK_FB1: E2.44 U$1.44
GP84_SD_CLK_FB2: E3.44 U$2.44
GP84_SD_CLK_FB3: E4.44 U$4.44
GP84_SD_CLK_FB4: E5.44 U$5.44
GP84_SD_CLK_FB5: E6.44 U$6.44
GP84_SD_CLK_FB6: E7.44 U$7.44
GP84_SD_CLK_FB7: E8.44 U$8.44
GP109_SPI_2_CLK: E1.55 U$3.55
GP109_SPI_2_CLK1: E2.55 U$1.55
GP109_SPI_2_CLK2: E3.55 U$2.55
GP109_SPI_2_CLK3: E4.55 U$4.55
GP109_SPI_2_CLK4: E5.55 U$5.55
GP109_SPI_2_CLK5: E6.55 U$6.55
GP109_SPI_2_CLK6: E7.55 U$7.55
GP109_SPI_2_CLK7: E8.55 U$8.55
GP110_SPI_2_FS0: E1.53 U$3.53
GP110_SPI_2_FS1: E2.53 U$1.53
GP110_SPI_2_FS2: E3.53 U$2.53
GP110_SPI_2_FS3: E4.53 U$4.53
GP110_SPI_2_FS4: E5.53 U$5.53
GP110_SPI_2_FS5: E6.53 U$6.53
GP110_SPI_2_FS6: E7.53 U$7.53
GP110_SPI_2_FS7: E8.53 U$8.53
GP111_SPI_2_FS1: E1.51 U$3.51
GP111_SPI_2_FS2: E2.51 U$1.51
GP111_SPI_2_FS3: E3.51 U$2.51
GP111_SPI_2_FS4: E4.51 U$4.51
GP111_SPI_2_FS5: E5.51 U$5.51
GP111_SPI_2_FS6: E6.51 U$6.51
GP111_SPI_2_FS7: E7.51 U$7.51
GP111_SPI_2_FS8: E8.51 U$8.51
GP114_SPI_2_RXD: E1.59 U$3.59
GP114_SPI_2_RXD1: E2.59 U$1.59
GP114_SPI_2_RXD2: E3.59 U$2.59
GP114_SPI_2_RXD3: E4.59 U$4.59
GP114_SPI_2_RXD4: E5.59 U$5.59
GP114_SPI_2_RXD5: E6.59 U$6.59
GP114_SPI_2_RXD6: E7.59 U$7.59
GP114_SPI_2_RXD7: E8.59 U$8.59
GP115_SPI_2_TXD: E1.57 U$3.57
GP115_SPI_2_TXD1: E2.57 U$1.57
GP115_SPI_2_TXD2: E3.57 U$2.57
GP115_SPI_2_TXD3: E4.57 U$4.57
GP115_SPI_2_TXD4: E5.57 U$5.57
GP115_SPI_2_TXD5: E6.57 U$6.57
GP115_SPI_2_TXD6: E7.57 U$7.57
GP115_SPI_2_TXD7: E8.57 U$8.57
GP128_UART_1_CTS: E1.65 U$3.65
GP128_UART_1_CTS1: E2.65 U$1.65
GP128_UART_1_CTS2: E3.65 U$2.65
GP128_UART_1_CTS3: E4.65 U$4.65
GP128_UART_1_CTS4: E5.65 U$5.65
GP128_UART_1_CTS5: E6.65 U$6.65
GP128_UART_1_CTS6: E7.65 U$7.65
GP128_UART_1_CTS7: E8.65 U$8.65
GP129_UART_1_RTS: E1.63 U$3.63
GP129_UART_1_RTS1: E2.63 U$1.63
GP129_UART_1_RTS2: E3.63 U$2.63
GP129_UART_1_RTS3: E4.63 U$4.63
GP129_UART_1_RTS4: E5.63 U$5.63
GP129_UART_1_RTS5: E6.63 U$6.63
GP129_UART_1_RTS6: E7.63 U$7.63
GP129_UART_1_RTS7: E8.63 U$8.63
GP130_UART_1_RX: E1.61 U1.5 U$3.61
GP130_UART_1_RX1: E2.61 U3.5 U$1.61
GP130_UART_1_RX2: E3.61 U6.5 U$2.61
GP130_UART_1_RX3: E4.61 U8.5 U$4.61
GP130_UART_1_RX4: E5.61 U10.5 U$5.61
GP130_UART_1_RX5: E6.61 U12.5 U$6.61
GP130_UART_1_RX6: E7.61 U14.5 U$7.61
GP130_UART_1_RX7: E8.61 U16.5 U$8.61
GP131_UART_1_TX: E1.46 U1.4 U$3.46
GP131_UART_1_TX1: E2.46 U3.4 U$1.46
GP131_UART_1_TX2: E3.46 U6.4 U$2.46
GP131_UART_1_TX3: E4.46 U8.4 U$4.46
GP131_UART_1_TX4: E5.46 U10.4 U$5.46
GP131_UART_1_TX5: E6.46 U12.4 U$6.46
GP131_UART_1_TX6: E7.46 U14.4 U$7.46
GP131_UART_1_TX7: E8.46 U16.4 U$8.46
GP134_UART_2_RX: E1.22 U1.3 U$3.22
GP134_UART_2_RX1: E2.22 U3.3 U$1.22
GP134_UART_2_RX2: E3.22 U6.3 U$2.22
GP134_UART_2_RX3: E4.22 U8.3 U$4.22
GP134_UART_2_RX4: E5.22 U10.3 U$5.22
GP134_UART_2_RX5: E6.22 U12.3 U$6.22
GP134_UART_2_RX6: E7.22 U14.3 U$7.22
GP134_UART_2_RX7: E8.22 U16.3 U$8.22
GP135_UART_2_TX: E1.27 U1.2 U$3.27
GP135_UART_2_TX1: E2.27 U3.2 U$1.27
GP135_UART_2_TX2: E3.27 U6.2 U$2.27
GP135_UART_2_TX3: E4.27 U8.2 U$4.27
GP135_UART_2_TX4: E5.27 U10.2 U$5.27
GP135_UART_2_TX5: E6.27 U12.2 U$6.27
GP135_UART_2_TX6: E7.27 U14.2 U$7.27
GP135_UART_2_TX7: E8.27 U16.2 U$8.27
GP165: E1.25 U$3.25
GP182_PWM1: E2.37 U$1.37
GP182_PWM2: E1.37 U$3.37
GP182_PWM3: E3.37 U$2.37
GP182_PWM4: E4.37 U$4.37
GP182_PWM5: E5.37 U$5.37
GP182_PWM6: E6.37 U$6.37
GP182_PWM7: E7.37 U$7.37
GP182_PWM8: E8.37 U$8.37
GP183_PWM1: E2.39 U$1.39
GP183_PWM2: E3.39 U$2.39
GP183_PWM3: E1.39 U$3.39
GP183_PWM4: E4.39 U$4.39
GP183_PWM5: E5.39 U$5.39
GP183_PWM6: E6.39 U$6.39
GP183_PWM7: E7.39 U$7.39
GP183_PWM8: E8.39 U$8.39
MSIC_SLP_CLK: E1.7 U$3.7
MSIC_SLP_CLK1: E2.7 U$1.7
MSIC_SLP_CLK2: E3.7 U$2.7
MSIC_SLP_CLK3: E4.7 U$4.7
MSIC_SLP_CLK4: E5.7 U$5.7
MSIC_SLP_CLK5: E6.7 U$6.7
MSIC_SLP_CLK6: E7.7 U$7.7
MSIC_SLP_CLK7: E8.7 U$8.7
N$1: Q1.1 R15.1
N$2: D1.C R1.2
N$3: R1.1 SJ1.2
N$4: R2.2 R3.2 S3.1
N$5: C4.2 R4.1 R6.2 U2.4
N$6: L2.P$1 U2.2
N$7: Q2.1 R7.1
N$8: D2.C R10.2
N$9: R10.1 SJ2.2
N$10: R11.2 R12.2 S5.1
N$11: C12.2 R16.1 R17.2 U5.4
N$12: D3.C R5.2
N$13: R5.1 SJ3.2
N$14: L3.P$1 U5.2
N$15: R8.2 R9.2 S1.1
N$16: Q3.1 R18.1
N$17: D4.C R19.2
N$18: C9.2 R13.1 R14.2 U4.4
N$19: L1.P$1 U4.2
N$20: R19.1 SJ4.2
N$21: R20.2 R21.2 S7.1
N$22: C17.2 R22.1 R23.2 U7.4
N$23: L4.P$1 U7.2
N$24: Q4.1 R24.1
N$25: D5.C R25.2
N$26: R25.1 SJ5.2
N$27: R26.2 R27.2 S9.1
N$28: C22.2 R28.1 R29.2 U9.4
N$29: L5.P$1 U9.2
N$30: Q5.1 R30.1
N$31: D6.C R31.2
N$32: R31.1 SJ6.2
N$33: R32.2 R33.2 S11.1
N$34: C27.2 R34.1 R35.2 U11.4
N$35: L6.P$1 U11.2
N$36: Q6.1 R36.1
N$37: D7.C R37.2
N$38: R37.1 SJ7.2
N$39: R38.2 R39.2 S13.1
N$40: C32.2 R40.1 R41.2 U13.4
N$41: L7.P$1 U13.2
N$42: Q7.1 R42.1
N$43: D8.C R43.2
N$44: R43.1 SJ8.2
N$45: R44.2 R45.2 S15.1
N$46: C37.2 R46.1 R47.2 U15.4
N$47: L8.P$1 U15.2
N$48: Q8.1 R48.1
OSC_CLK_OUT: E1.67 U$3.67
OSC_CLK_OUT1: E2.67 U$1.67
OSC_CLK_OUT2: E3.67 U$2.67
OSC_CLK_OUT3: E4.67 U$4.67
OSC_CLK_OUT4: E5.67 U$5.67
OSC_CLK_OUT5: E6.67 U$6.67
OSC_CLK_OUT6: E7.67 U$7.67
OSC_CLK_OUT7: E8.67 U$8.67
PSW: E1.21 U$3.21
PSW1: E2.21 U$1.21
PSW2: E3.21 U$2.21
PSW3: E4.21 U$4.21
PSW4: E5.21 U$5.21
PSW5: E6.21 U$6.21
PSW6: E7.21 U$7.21
PSW7: E8.21 U$8.21
PWRBTN#: E1.17 R9.1 U$3.17
PWRBTN#1: E2.17 R3.1 U$1.17
PWRBTN#2: E3.17 R12.1 U$2.17
PWRBTN#3: E4.17 R21.1 U$4.17
PWRBTN#4: E5.17 R27.1 U$5.17
PWRBTN#5: E6.17 R33.1 U$6.17
PWRBTN#6: E7.17 R39.1 U$7.17
PWRBTN#7: E8.17 R45.1 U$8.17
RCVR_MODE: E1.31 U$3.31
RCVR_MODE1: E2.31 U$1.31
RCVR_MODE2: E3.31 U$2.31
RCVR_MODE3: E4.31 U$4.31
RCVR_MODE4: E5.31 U$5.31
RCVR_MODE5: E6.31 U$6.31
RCVR_MODE6: E7.31 U$7.31
RCVR_MODE7: E8.31 U$8.31
RESET_OUT#: E1.36 U$3.36
RESET_OUT#1: E2.36 U$1.36
RESET_OUT#2: E3.36 U$2.36
RESET_OUT#3: E4.36 U$4.36
RESET_OUT#4: E5.36 U$5.36
RESET_OUT#5: E6.36 U$6.36
RESET_OUT#6: E7.36 U$7.36
RESET_OUT#7: E8.36 U$8.36
RXI: JP2.3 S2.5
RXI1: JP1.3 S4.5
RXI2: JP3.3 S6.5
RXI3: JP4.3 S8.5
RXI4: JP5.3 S10.5
RXI5: JP6.3 S12.5
RXI6: JP7.3 S14.5
RXI7: JP8.3 S16.5
TXO: JP2.2 S2.2
TXO1: JP1.2 S4.2
TXO2: JP3.2 S6.2
TXO3: JP4.2 S8.2
TXO4: JP5.2 S10.2
TXO5: JP6.2 S12.2
TXO6: JP7.2 S14.2
TXO7: JP8.2 S16.2
UART1RX: S2.6 U1.10
UART1RX1: S4.6 U3.10
UART1RX2: S6.6 U6.10
UART1RX3: S8.6 U8.10
UART1RX4: S10.6 U10.10
UART1RX5: S12.6 U12.10
UART1RX6: S14.6 U14.10
UART1RX7: S16.6 U16.10
UART1TX: S2.3 U1.11
UART1TX1: S4.3 U3.11
UART1TX2: S6.3 U6.11
UART1TX3: S8.3 U8.11
UART1TX4: S10.3 U10.11
UART1TX5: S12.3 U12.11
UART1TX6: S14.3 U14.11
UART1TX7: S16.3 U16.11
UART2RX: S2.4 U1.12
UART2RX1: S4.4 U3.12
UART2RX2: S6.4 U6.12
UART2RX3: S8.4 U8.12
UART2RX4: S10.4 U10.12
UART2RX5: S12.4 U12.12
UART2RX6: S14.4 U14.12
UART2RX7: S16.4 U16.12
UART2TX: S2.1 U1.13
UART2TX1: S4.1 U3.13
UART2TX2: S6.1 U6.13
UART2TX3: S8.1 U8.13
UART2TX4: S10.1 U10.13
UART2TX5: S12.1 U12.13
UART2TX6: S14.1 U14.13
UART2TX7: S16.1 U16.13
USB_DN: E1.18 U$3.18
USB_DN1: E2.18 U$1.18
USB_DN2: E3.18 U$2.18
USB_DN3: E4.18 U$4.18
USB_DN4: E5.18 U$5.18
USB_DN5: E6.18 U$6.18
USB_DN6: E7.18 U$7.18
USB_DN7: E8.18 U$8.18
USB_DP: E1.16 U$3.16
USB_DP1: E2.16 U$1.16
USB_DP2: E3.16 U$2.16
USB_DP3: E4.16 U$4.16
USB_DP4: E5.16 U$5.16
USB_DP5: E6.16 U$6.16
USB_DP6: E7.16 U$7.16
USB_DP7: E8.16 U$8.16
USB_ID: E1.3 U$3.3
USB_ID1: E2.3 U$1.3
USB_ID2: E3.3 U$2.3
USB_ID3: E4.3 U$4.3
USB_ID4: E5.3 U$5.3
USB_ID5: E6.3 U$6.3
USB_ID6: E7.3 U$7.3
USB_ID7: E8.3 U$8.3
USB_VBUS: E1.20 U$3.20
USB_VBUS1: E2.20 U$1.20
USB_VBUS2: E3.20 U$2.20
USB_VBUS3: E4.20 U$4.20
USB_VBUS4: E5.20 U$5.20
USB_VBUS5: E6.20 U$6.20
USB_VBUS6: E7.20 U$7.20
USB_VBUS7: E8.20 U$8.20
V_BAT_BKUP: E1.23 U$3.23
V_BAT_BKUP1: E2.23 U$1.23
V_BAT_BKUP2: E3.23 U$2.23
V_BAT_BKUP3: E4.23 U$4.23
V_BAT_BKUP4: E5.23 U$5.23
V_BAT_BKUP5: E6.23 U$6.23
V_BAT_BKUP6: E7.23 U$7.23
V_BAT_BKUP7: E8.23 U$8.23
VCC: C1.1 C10.1 JP2.4 R15.2 U1.14 U4.5 U4.7 U4.8
VCC1: C5.1 C6.1 JP1.4 R7.2 U2.5 U2.7 U2.8 U3.14
VCC2: C13.1 C14.1 JP3.4 R18.2 U5.5 U5.7 U5.8 U6.14
VCC3: C18.1 C19.1 JP4.4 R24.2 U7.5 U7.7 U7.8 U8.14
VCC4: C23.1 C24.1 JP5.4 R30.2 U9.5 U9.7 U9.8 U10.14
VCC5: C28.1 C29.1 JP6.4 R36.2 U11.5 U11.7 U11.8 U12.14
VCC6: C33.1 C34.1 JP7.4 R42.2 U13.5 U13.7 U13.8 U14.14
VCC7: C38.1 C39.1 JP8.4 R48.2 U15.5 U15.7 U15.8 U16.14
VSYS: C8.1 C9.1 D3.A E1.2 E1.4 E1.6 L1.P$2 Q1.3 R8.1 R13.2 U$3.2 U$3.4 U$3.6
VSYS1: C3.1 C4.1 D1.A E2.2 E2.4 E2.6 L2.P$2 Q2.3 R2.1 R4.2 U$1.2 U$1.4 U$1.6
VSYS2: C11.1 C12.1 D2.A E3.2 E3.4 E3.6 L3.P$2 Q3.3 R11.1 R16.2 U$2.2 U$2.4 U$2.6
VSYS3: C16.1 C17.1 D4.A E4.2 E4.4 E4.6 L4.P$2 Q4.3 R20.1 R22.2 U$4.2 U$4.4 U$4.6
VSYS4: C21.1 C22.1 D5.A E5.2 E5.4 E5.6 L5.P$2 Q5.3 R26.1 R28.2 U$5.2 U$5.4 U$5.6
VSYS5: C26.1 C27.1 D6.A E6.2 E6.4 E6.6 L6.P$2 Q6.3 R32.1 R34.2 U$6.2 U$6.4 U$6.6
VSYS6: C31.1 C32.1 D7.A E7.2 E7.4 E7.6 L7.P$2 Q7.3 R38.1 R40.2 U$7.2 U$7.4 U$7.6
VSYS7: C36.1 C37.1 D8.A E8.2 E8.4 E8.6 L8.P$2 Q8.3 R44.1 R46.2 U$8.2 U$8.4 U$8.6

## Tracks (layer width: path | path; a pad name or v marks a point on that pad's centre or on a via)
1.8V  (via drill 0.33)
  Top 0.152: U$3.12 31.55,27.84 31.5,27.89 30.56,27.89 29.69,28.75 v29.69,29.39
  Top 0.203: U1.1 14.99,25.27 16.38,26.67 21.59,26.67 22.61,27.69 U1.8 22.65,29.93 C2.1 24.51,30.48 25.15,31.11 v25.4,31.11
  Bottom 0.152: U$3.12 | v29.69,29.39 29.69,28.75 30.56,27.89 31.5,27.89 31.55,27.84 U$3.12
  Bottom 0.203: v25.4,31.11 27.96,31.11 v29.69,29.39
1.8V1  (via drill 0.33)
  Top 0.152: U$1.12 64.57,27.84 64.52,27.89 63.58,27.89 62.71,28.75 v62.71,29.39
  Top 0.203: U3.1 48.01,25.27 49.4,26.67 54.61,26.67 55.63,27.69 U3.8 55.67,29.93 C7.1 57.53,30.48 58.17,31.11 v58.42,31.11
  Bottom 0.152: U$1.12 | v62.71,29.39 62.71,28.75 63.58,27.89 64.52,27.89 64.57,27.84 U$1.12
  Bottom 0.203: v58.42,31.11 60.98,31.11 v62.71,29.39
1.8V2  (via drill 0.33)
  Top 0.152: U$2.12 97.59,27.84 97.54,27.89 96.6,27.89 95.73,28.75 v95.73,29.39
  Top 0.203: U6.1 81.03,25.27 82.42,26.67 87.63,26.67 88.65,27.69 U6.8 88.69,29.93 C15.1 90.55,30.48 91.19,31.11 v91.44,31.11
  Bottom 0.152: U$2.12 | v95.73,29.39 95.73,28.75 96.6,27.89 97.54,27.89 97.59,27.84 U$2.12
  Bottom 0.203: v91.44,31.11 94,31.11 v95.73,29.39
1.8V3  (via drill 0.33)
  Top 0.152: U$4.12 130.61,27.84 130.56,27.89 129.62,27.89 128.75,28.75 v128.75,29.39
  Top 0.203: U8.1 114.05,25.27 115.44,26.67 120.65,26.67 121.67,27.69 U8.8 121.71,29.93 C20.1 123.57,30.48 124.21,31.11 v124.46,31.11
  Bottom 0.152: U$4.12 | v128.75,29.39 128.75,28.75 129.62,27.89 130.56,27.89 130.61,27.84 U$4.12
  Bottom 0.203: v124.46,31.11 127.03,31.11 v128.75,29.39
1.8V4  (via drill 0.33)
  Top 0.152: U$5.12 31.55,76.1 31.5,76.15 30.56,76.15 29.69,77.01 v29.69,77.65
  Top 0.203: U10.1 14.99,73.53 16.38,74.93 21.59,74.93 22.61,75.95 U10.8 22.65,78.19 C25.1 24.51,78.74 25.15,79.38 v25.4,79.38
  Bottom 0.152: U$5.12 | v29.69,77.65 29.69,77.01 30.56,76.15 31.5,76.15 31.55,76.1 U$5.12
  Bottom 0.203: v25.4,79.38 27.96,79.38 v29.69,77.65
1.8V5  (via drill 0.33)
  Top 0.152: U$6.12 64.57,76.1 64.52,76.15 63.58,76.15 62.71,77.01 v62.71,77.65
  Top 0.203: U12.1 48.01,73.53 49.4,74.93 54.61,74.93 55.63,75.95 U12.8 55.67,78.19 C30.1 57.53,78.74 58.17,79.38 v58.42,79.38
  Bottom 0.152: U$6.12 | v62.71,77.65 62.71,77.01 63.58,76.15 64.52,76.15 64.57,76.1 U$6.12
  Bottom 0.203: v58.42,79.38 60.98,79.38 v62.71,77.65
1.8V6  (via drill 0.33)
  Top 0.152: U$7.12 97.59,76.1 97.54,76.15 96.6,76.15 95.73,77.01 v95.73,77.65
  Top 0.203: U14.1 81.03,73.53 82.42,74.93 87.63,74.93 88.65,75.95 U14.8 88.69,78.19 C35.1 90.55,78.74 91.19,79.38 v91.44,79.38
  Bottom 0.152: U$7.12 | v95.73,77.65 95.73,77.01 96.6,76.15 97.54,76.15 97.59,76.1 U$7.12
  Bottom 0.203: v91.44,79.38 94,79.38 v95.73,77.65
1.8V7  (via drill 0.33)
  Top 0.152: U$8.12 130.61,76.1 130.56,76.15 129.62,76.15 128.75,77.01 v128.75,77.65
  Top 0.203: U16.1 114.05,73.53 115.44,74.93 120.65,74.93 121.67,75.95 U16.8 121.71,78.19 C40.1 123.57,78.74 124.21,79.38 v124.46,79.38
  Bottom 0.152: U$8.12 | v128.75,77.65 128.75,77.01 129.62,76.15 130.56,76.15 130.61,76.1 U$8.12
  Bottom 0.203: v124.46,79.38 127.03,79.38 v128.75,77.65
3.3V  (via drill 0.33)
  Top 0.152: U$3.10 31.32,28.24 31.24,28.32 31.24,28.64
  Top 0.178: v30.59,28.82 30.77,28.64 31.24,28.64 U$3.8
  Bottom 0.152: U$3.10 31.32,28.24 31.24,28.32 31.24,28.64 | U$3.8
  Bottom 0.178: U$3.8 31.24,28.64 30.77,28.64 v30.59,28.82
3.3V1  (via drill 0.33)
  Top 0.152: U$1.10 64.34,28.24 64.26,28.32 64.26,28.64
  Top 0.178: v63.61,28.82 63.79,28.64 64.26,28.64 U$1.8
  Bottom 0.152: U$1.10 64.34,28.24 64.26,28.32 64.26,28.64 | U$1.8
  Bottom 0.178: U$1.8 64.26,28.64 63.79,28.64 v63.61,28.82
3.3V2  (via drill 0.33)
  Top 0.152: U$2.10 97.36,28.24 97.28,28.32 97.28,28.64
  Top 0.178: v96.63,28.82 96.81,28.64 97.28,28.64 U$2.8
  Bottom 0.152: U$2.10 97.36,28.24 97.28,28.32 97.28,28.64 | U$2.8
  Bottom 0.178: U$2.8 97.28,28.64 96.81,28.64 v96.63,28.82
3.3V3  (via drill 0.33)
  Top 0.152: U$4.10 130.38,28.24 130.3,28.32 130.3,28.64
  Top 0.178: v129.65,28.82 129.83,28.64 130.3,28.64 U$4.8
  Bottom 0.152: U$4.10 130.38,28.24 130.3,28.32 130.3,28.64 | U$4.8
  Bottom 0.178: U$4.8 130.3,28.64 129.83,28.64 v129.65,28.82
3.3V4  (via drill 0.33)
  Top 0.152: U$5.10 31.32,76.5 31.24,76.58 31.24,76.9
  Top 0.178: v30.59,77.08 30.77,76.9 31.24,76.9 U$5.8
  Bottom 0.152: U$5.10 31.32,76.5 31.24,76.58 31.24,76.9 | U$5.8
  Bottom 0.178: U$5.8 31.24,76.9 30.77,76.9 v30.59,77.08
3.3V5  (via drill 0.33)
  Top 0.152: U$6.10 64.34,76.5 64.26,76.58 64.26,76.9
  Top 0.178: v63.61,77.08 63.79,76.9 64.26,76.9 U$6.8
  Bottom 0.152: U$6.10 64.34,76.5 64.26,76.58 64.26,76.9 | U$6.8
  Bottom 0.178: U$6.8 64.26,76.9 63.79,76.9 v63.61,77.08
3.3V6  (via drill 0.33)
  Top 0.152: U$7.10 97.36,76.5 97.28,76.58 97.28,76.9
  Top 0.178: v96.63,77.08 96.81,76.9 97.28,76.9 U$7.8
  Bottom 0.152: U$7.10 97.36,76.5 97.28,76.58 97.28,76.9 | U$7.8
  Bottom 0.178: U$7.8 97.28,76.9 96.81,76.9 v96.63,77.08
3.3V7  (via drill 0.33)
  Top 0.152: U$8.10 130.38,76.5 130.3,76.58 130.3,76.9
  Top 0.178: v129.65,77.08 129.83,76.9 130.3,76.9 U$8.8
  Bottom 0.152: U$8.10 130.38,76.5 130.3,76.58 130.3,76.9 | U$8.8
  Bottom 0.178: U$8.8 130.3,76.9 129.83,76.9 v129.65,77.08
DCIN  (via drill 0.33)
  Top 0.152: E1.14 31.49,27.44 31.39,27.53 30.25,27.53 29.11,28.68 v28.98,28.68
  Top 0.203: Q1.2 15.61,22.06 v16.08,22.53
  Bottom 0.152: E1.14 31.49,27.44 31.39,27.53 30.25,27.53 29.11,28.68 v28.98,28.68 28.17,28.68 27.05,27.56 27.05,24.74 26.52,24.21 17.75,24.21 v16.08,22.53
DCIN1  (via drill 0.33)
  Top 0.152: E2.14 64.51,27.44 64.41,27.53 63.27,27.53 62.13,28.68 v62,28.68
  Top 0.203: Q2.2 48.62,22.06 v49.1,22.53
  Bottom 0.152: E2.14 64.51,27.44 64.41,27.53 63.27,27.53 62.13,28.68 v62,28.68 61.19,28.68 60.07,27.56 60.07,24.74 59.54,24.21 50.77,24.21 v49.1,22.53
DCIN2  (via drill 0.33)
  Top 0.152: E3.14 97.53,27.44 97.43,27.53 96.29,27.53 95.15,28.68 v95.02,28.68
  Top 0.203: Q3.2 81.64,22.06 v82.12,22.53
  Bottom 0.152: E3.14 97.53,27.44 97.43,27.53 96.29,27.53 95.15,28.68 v95.02,28.68 94.21,28.68 93.09,27.56 93.09,24.74 92.56,24.21 83.8,24.21 v82.12,22.53
DCIN3  (via drill 0.33)
  Top 0.152: E4.14 130.55,27.44 130.45,27.53 129.31,27.53 128.17,28.68 v128.04,28.68
  Top 0.203: Q4.2 114.67,22.06 v115.14,22.53
  Bottom 0.152: E4.14 130.55,27.44 130.45,27.53 129.31,27.53 128.17,28.68 v128.04,28.68 127.23,28.68 126.11,27.56 126.11,24.74 125.58,24.21 116.81,24.21 v115.14,22.53
DCIN4  (via drill 0.33)
  Top 0.152: E5.14 31.49,75.7 31.39,75.79 30.25,75.79 29.11,76.94 v28.98,76.94
  Top 0.203: Q5.2 15.61,70.32 v16.08,70.79
  Bottom 0.152: E5.14 31.49,75.7 31.39,75.79 30.25,75.79 29.11,76.94 v28.98,76.94 28.17,76.94 27.05,75.82 27.05,73 26.52,72.47 17.75,72.47 v16.08,70.79
DCIN5  (via drill 0.33)
  Top 0.152: E6.14 64.51,75.7 64.41,75.79 63.27,75.79 62.13,76.94 v62,76.94
  Top 0.203: Q6.2 48.62,70.32 v49.1,70.79
  Bottom 0.152: E6.14 64.51,75.7 64.41,75.79 63.27,75.79 62.13,76.94 v62,76.94 61.19,76.94 60.07,75.82 60.07,73 59.54,72.47 50.77,72.47 v49.1,70.79
DCIN6  (via drill 0.33)
  Top 0.152: E7.14 97.53,75.7 97.43,75.79 96.29,75.79 95.15,76.94 v95.02,76.94
  Top 0.203: Q7.2 81.64,70.32 v82.12,70.79
  Bottom 0.152: E7.14 97.53,75.7 97.43,75.79 96.29,75.79 95.15,76.94 v95.02,76.94 94.21,76.94 93.09,75.82 93.09,73 92.56,72.47 83.8,72.47 v82.12,70.79
DCIN7  (via drill 0.33)
  Top 0.152: E8.14 130.55,75.7 130.45,75.79 129.31,75.79 128.17,76.94 v128.04,76.94
  Top 0.203: Q8.2 114.67,70.32 v115.14,70.79
  Bottom 0.152: E8.14 130.55,75.7 130.45,75.79 129.31,75.79 128.17,76.94 v128.04,76.94 127.23,76.94 126.11,75.82 126.11,73 125.58,72.47 116.81,72.47 v115.14,70.79
FAULT  (via drill 0.33)
  Top 0.152: U$3.19 35.64,26.24 35.81,26.42 36.63,26.42 36.93,26.72 37.44,26.72 v38.1,27.38
  Bottom 0.152: v38.1,27.38 37.44,26.72 36.93,26.72 36.63,26.42 35.81,26.42 35.64,26.24 U$3.19
FAULT1  (via drill 0.33)
  Top 0.152: U$1.19 68.66,26.24 68.83,26.42 69.65,26.42 69.95,26.72 70.46,26.72 v71.12,27.38
  Bottom 0.152: v71.12,27.38 70.46,26.72 69.95,26.72 69.65,26.42 68.83,26.42 68.66,26.24 U$1.19
FAULT2  (via drill 0.33)
  Top 0.152: U$2.19 101.68,26.24 101.85,26.42 102.67,26.42 102.97,26.72 103.48,26.72 v104.14,27.38
  Bottom 0.152: v104.14,27.38 103.48,26.72 102.97,26.72 102.67,26.42 101.85,26.42 101.68,26.24 U$2.19
FAULT3  (via drill 0.33)
  Top 0.152: U$4.19 134.7,26.24 134.87,26.42 135.69,26.42 135.99,26.72 136.5,26.72 v137.16,27.38
  Bottom 0.152: v137.16,27.38 136.5,26.72 135.99,26.72 135.69,26.42 134.87,26.42 134.7,26.24 U$4.19
FAULT4  (via drill 0.33)
  Top 0.152: U$5.19 35.64,74.5 35.81,74.68 36.63,74.68 36.93,74.98 37.44,74.98 v38.1,75.64
  Bottom 0.152: v38.1,75.64 37.44,74.98 36.93,74.98 36.63,74.68 35.81,74.68 35.64,74.5 U$5.19
FAULT5  (via drill 0.33)
  Top 0.152: U$6.19 68.66,74.5 68.83,74.68 69.65,74.68 69.95,74.98 70.46,74.98 v71.12,75.64
  Bottom 0.152: v71.12,75.64 70.46,74.98 69.95,74.98 69.65,74.68 68.83,74.68 68.66,74.5 U$6.19
FAULT6  (via drill 0.33)
  Top 0.152: U$7.19 101.68,74.5 101.85,74.68 102.67,74.68 102.97,74.98 103.48,74.98 v104.14,75.64
  Bottom 0.152: v104.14,75.64 103.48,74.98 102.97,74.98 102.67,74.68 101.85,74.68 101.68,74.5 U$7.19
FAULT7  (via drill 0.33)
  Top 0.152: U$8.19 134.7,74.5 134.87,74.68 135.69,74.68 135.99,74.98 136.5,74.98 v137.16,75.64
  Bottom 0.152: v137.16,75.64 136.5,74.98 135.99,74.98 135.69,74.68 134.87,74.68 134.7,74.5 U$8.19
FW_RCVR  (via drill 0.33)
  Top 0.152: v35.38,15.16 35.79,15.57 35.79,16.1 35.65,16.24 U$3.69
  Bottom 0.152: U$3.69 35.65,16.24 35.79,16.1 35.79,15.57 v35.38,15.16
FW_RCVR1  (via drill 0.33)
  Top 0.152: v68.4,15.16 68.81,15.57 68.81,16.1 68.67,16.24 U$1.69
  Bottom 0.152: U$1.69 68.67,16.24 68.81,16.1 68.81,15.57 v68.4,15.16
FW_RCVR2  (via drill 0.33)
  Top 0.152: v101.42,15.16 101.83,15.57 101.83,16.1 101.69,16.24 U$2.69
  Bottom 0.152: U$2.69 101.69,16.24 101.83,16.1 101.83,15.57 v101.42,15.16
FW_RCVR3  (via drill 0.33)
  Top 0.152: v134.44,15.16 134.85,15.57 134.85,16.1 134.71,16.24 U$4.69
  Bottom 0.152: U$4.69 134.71,16.24 134.85,16.1 134.85,15.57 v134.44,15.16
FW_RCVR4  (via drill 0.33)
  Top 0.152: v35.38,63.42 35.79,63.83 35.79,64.36 35.65,64.5 U$5.69
  Bottom 0.152: U$5.69 35.65,64.5 35.79,64.36 35.79,63.83 v35.38,63.42
FW_RCVR5  (via drill 0.33)
  Top 0.152: v68.4,63.42 68.81,63.83 68.81,64.36 68.67,64.5 U$6.69
  Bottom 0.152: U$6.69 68.67,64.5 68.81,64.36 68.81,63.83 v68.4,63.42
FW_RCVR6  (via drill 0.33)
  Top 0.152: v101.42,63.42 101.83,63.83 101.83,64.36 101.69,64.5 U$7.69
  Bottom 0.152: U$7.69 101.69,64.5 101.83,64.36 101.83,63.83 v101.42,63.42
FW_RCVR7  (via drill 0.33)
  Top 0.152: v134.44,63.42 134.85,63.83 134.85,64.36 134.71,64.5 U$8.69
  Bottom 0.152: U$8.69 134.71,64.5 134.85,64.36 134.85,63.83 v134.44,63.42
GND  (via drill 0.33, 0.51)
  Top 0.254: U4.6 20.32,16.77 U4.PAD 20.32,17.02 U4.3
  other vias: 36.02,27.38 37.13,29.03 35.94,30.99 34.16,32.13 25.91,26.06 25.02,25.17
  pour Bottom (isolate 0.051, rank 6): 39.37,49.53 39.37,8.64 arc-90 37.59,6.86 10.67,6.86 arc-90 8.89,8.64 8.89,49.53 arc-90 10.67,51.31 37.59,51.31 arc-90
  pour Top (isolate 0.051, rank 6): 39.37,8.59 arc-90 37.64,6.86 10.67,6.86 arc-90 8.89,8.64 8.89,49.53 arc-90 10.67,51.31 37.59,51.31 arc-90 39.37,49.53
GND1  (via drill 0.33, 0.51)
  Top 0.254: U2.6 53.34,16.77 U2.PAD 53.34,17.02 U2.3
  other vias: 69.04,27.38 70.15,29.03 68.96,30.99 67.18,32.13 58.93,26.06 58.04,25.17
  pour Bottom (isolate 0.051, rank 6): 72.39,49.53 72.39,8.64 arc-90 70.61,6.86 43.69,6.86 arc-90 41.91,8.64 41.91,49.53 arc-90 43.69,51.31 70.61,51.31 arc-90
  pour Top (isolate 0.051, rank 6): 72.39,8.59 arc-90 70.66,6.86 43.69,6.86 arc-90 41.91,8.64 41.91,49.53 arc-90 43.69,51.31 70.61,51.31 arc-90 72.39,49.53
GND2  (via drill 0.33, 0.51)
  Top 0.254: U5.6 86.36,16.77 U5.PAD 86.36,17.02 U5.3
  other vias: 102.06,27.38 103.17,29.03 101.98,30.99 100.2,32.13 91.95,26.06 91.06,25.17
  pour Bottom (isolate 0.051, rank 6): 105.41,49.53 105.41,8.64 arc-90 103.63,6.86 76.71,6.86 arc-90 74.93,8.64 74.93,49.53 arc-90 76.71,51.31 103.63,51.31 arc-90
  pour Top (isolate 0.051, rank 6): 105.41,8.59 arc-90 103.68,6.86 76.71,6.86 arc-90 74.93,8.64 74.93,49.53 arc-90 76.71,51.31 103.63,51.31 arc-90 105.41,49.53
GND3  (via drill 0.33, 0.51)
  Top 0.254: U7.6 119.38,16.77 U7.PAD 119.38,17.02 U7.3
  other vias: 135.08,27.38 136.19,29.03 135,30.99 133.22,32.13 124.97,26.06 124.08,25.17
  pour Bottom (isolate 0.051, rank 6): 138.43,49.53 138.43,8.64 arc-90 136.65,6.86 109.73,6.86 arc-90 107.95,8.64 107.95,49.53 arc-90 109.73,51.31 136.65,51.31 arc-90
  pour Top (isolate 0.051, rank 6): 138.43,8.59 arc-90 136.7,6.86 109.73,6.86 arc-90 107.95,8.64 107.95,49.53 arc-90 109.73,51.31 136.65,51.31 arc-90 138.43,49.53
GND4  (via drill 0.33, 0.51)
  Top 0.254: U9.6 20.32,65.03 U9.PAD 20.32,65.28 U9.3
  other vias: 36.02,75.64 37.13,77.29 35.94,79.25 34.16,80.39 25.91,74.32 25.02,73.43
  pour Bottom (isolate 0.051, rank 6): 39.37,97.79 39.37,56.9 arc-90 37.59,55.12 10.67,55.12 arc-90 8.89,56.9 8.89,97.79 arc-90 10.67,99.57 37.59,99.57 arc-90
  pour Top (isolate 0.051, rank 6): 39.37,56.85 arc-90 37.64,55.12 10.67,55.12 arc-90 8.89,56.9 8.89,97.79 arc-90 10.67,99.57 37.59,99.57 arc-90 39.37,97.79
GND5  (via drill 0.33, 0.51)
  Top 0.254: U11.6 53.34,65.03 U11.PAD 53.34,65.28 U11.3
  other vias: 69.04,75.64 70.15,77.29 68.96,79.25 67.18,80.39 58.93,74.32 58.04,73.43
  pour Bottom (isolate 0.051, rank 6): 72.39,97.79 72.39,56.9 arc-90 70.61,55.12 43.69,55.12 arc-90 41.91,56.9 41.91,97.79 arc-90 43.69,99.57 70.61,99.57 arc-90
  pour Top (isolate 0.051, rank 6): 72.39,56.85 arc-90 70.66,55.12 43.69,55.12 arc-90 41.91,56.9 41.91,97.79 arc-90 43.69,99.57 70.61,99.57 arc-90 72.39,97.79
GND6  (via drill 0.33, 0.51)
  Top 0.254: U13.6 86.36,65.03 U13.PAD 86.36,65.28 U13.3
  other vias: 102.06,75.64 103.17,77.29 101.98,79.25 100.2,80.39 91.95,74.32 91.06,73.43
  pour Bottom (isolate 0.051, rank 6): 105.41,97.79 105.41,56.9 arc-90 103.63,55.12 76.71,55.12 arc-90 74.93,56.9 74.93,97.79 arc-90 76.71,99.57 103.63,99.57 arc-90
  pour Top (isolate 0.051, rank 6): 105.41,56.85 arc-90 103.68,55.12 76.71,55.12 arc-90 74.93,56.9 74.93,97.79 arc-90 76.71,99.57 103.63,99.57 arc-90 105.41,97.79
GND7  (via drill 0.33, 0.51)
  Top 0.254: U15.6 119.38,65.03 U15.PAD 119.38,65.28 U15.3
  other vias: 135.08,75.64 136.19,77.29 135,79.25 133.22,80.39 124.97,74.32 124.08,73.43
  pour Bottom (isolate 0.051, rank 6): 138.43,97.79 138.43,56.9 arc-90 136.65,55.12 109.73,55.12 arc-90 107.95,56.9 107.95,97.79 arc-90 109.73,99.57 136.65,99.57 arc-90
  pour Top (isolate 0.051, rank 6): 138.43,56.85 arc-90 136.7,55.12 109.73,55.12 arc-90 107.95,56.9 107.95,97.79 arc-90 109.73,99.57 136.65,99.57 arc-90 138.43,97.79
GP1  (via drill 0.33)
  Top 0.152: v63.17,20.62 63.18,20.64 U$1.48